# Altium PCB Sampler_DIOT.PCBDOC (part 1 of 10)
Units mm, origin at the board's own origin, x right, y up, seen from the top; angles counter-clockwise.
Board outline 222.9 x 100 mm, 4 copper layers (L1, P2, L3, L4), stack 1.6 mm thick; 697 components, 418 nets, 2175 pads, 1124 vias.
Unrouted connection lines stored in the file: 6.
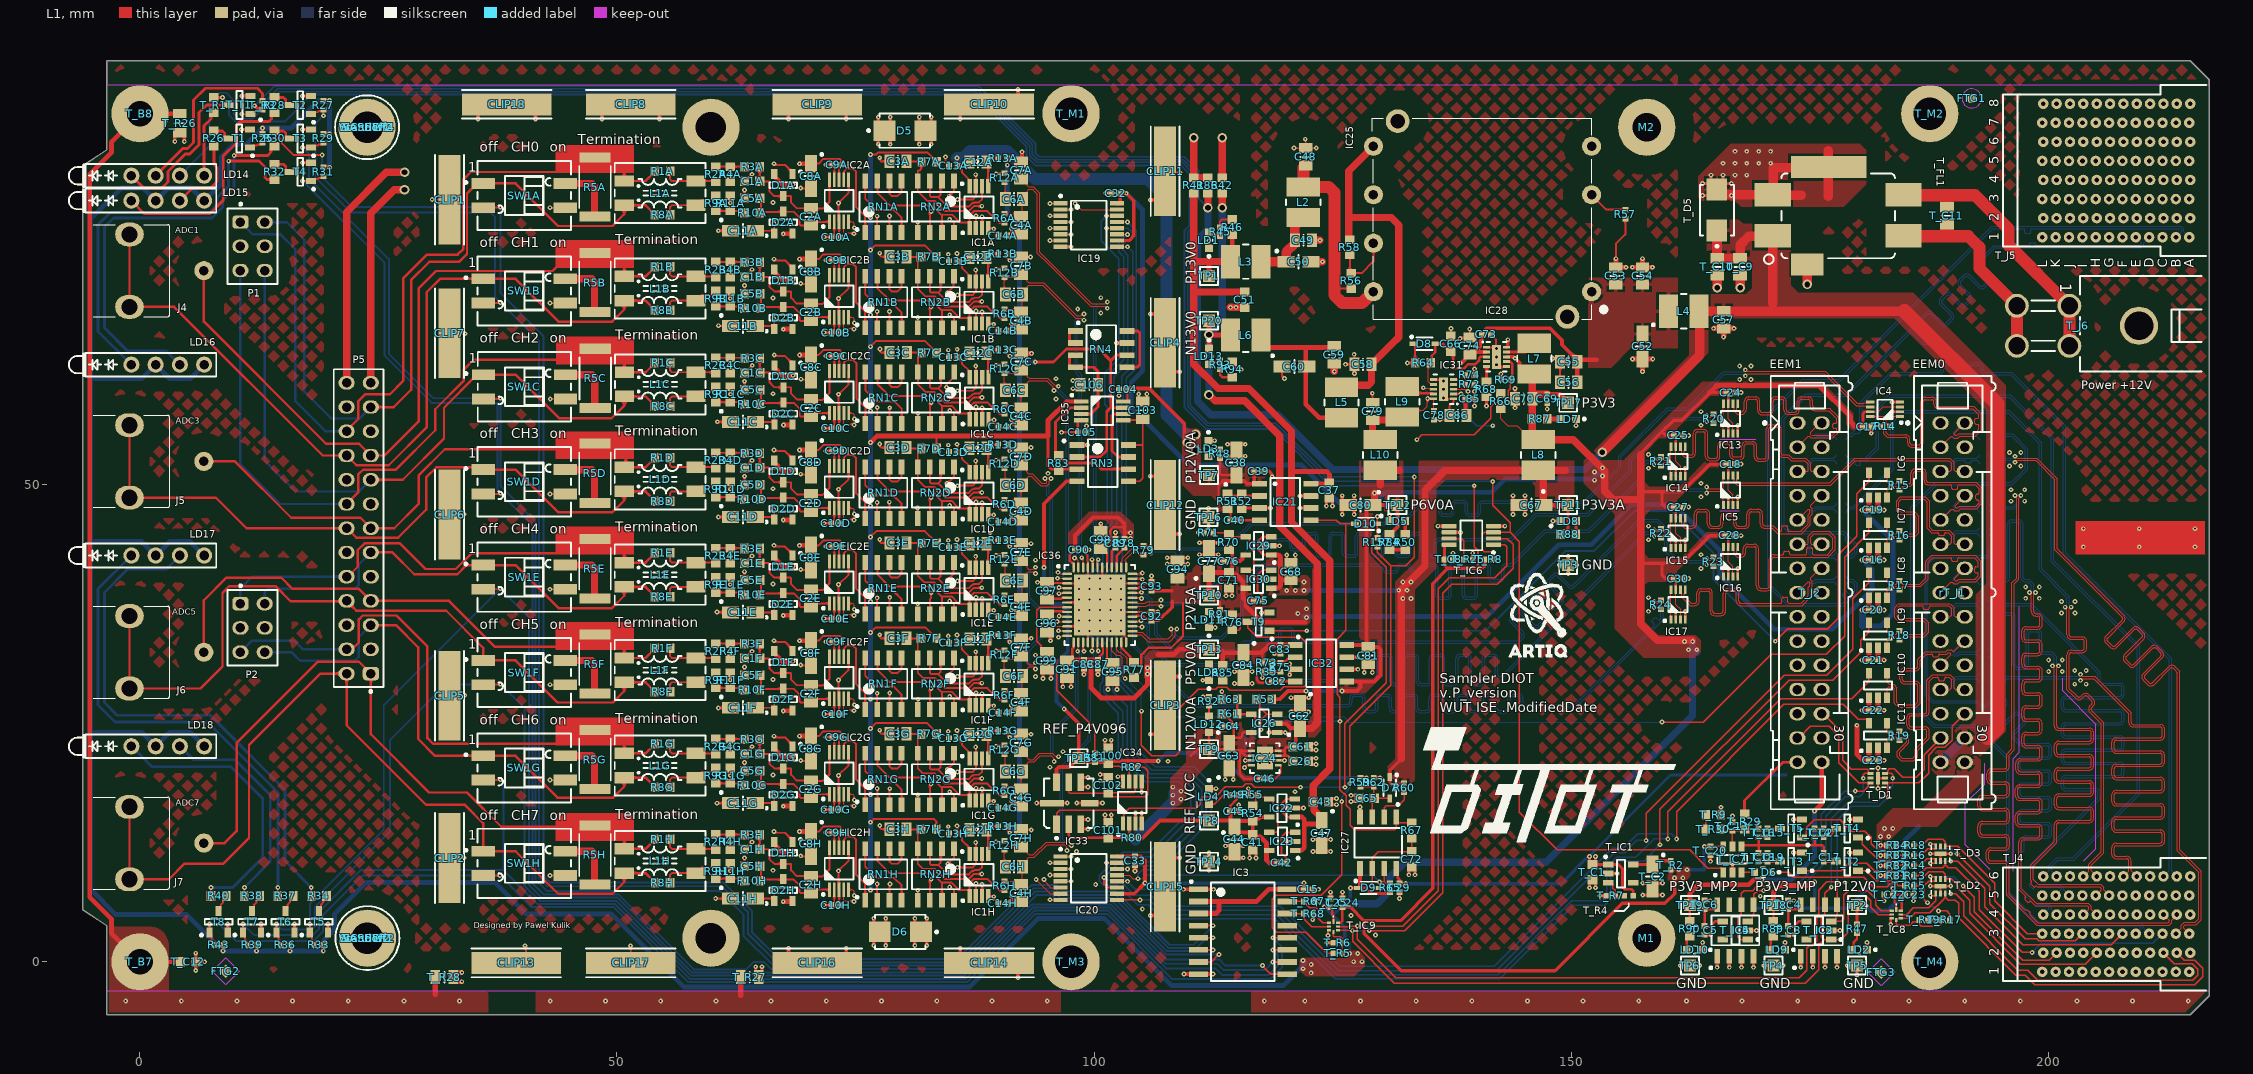
[diagram p0: L1 view]
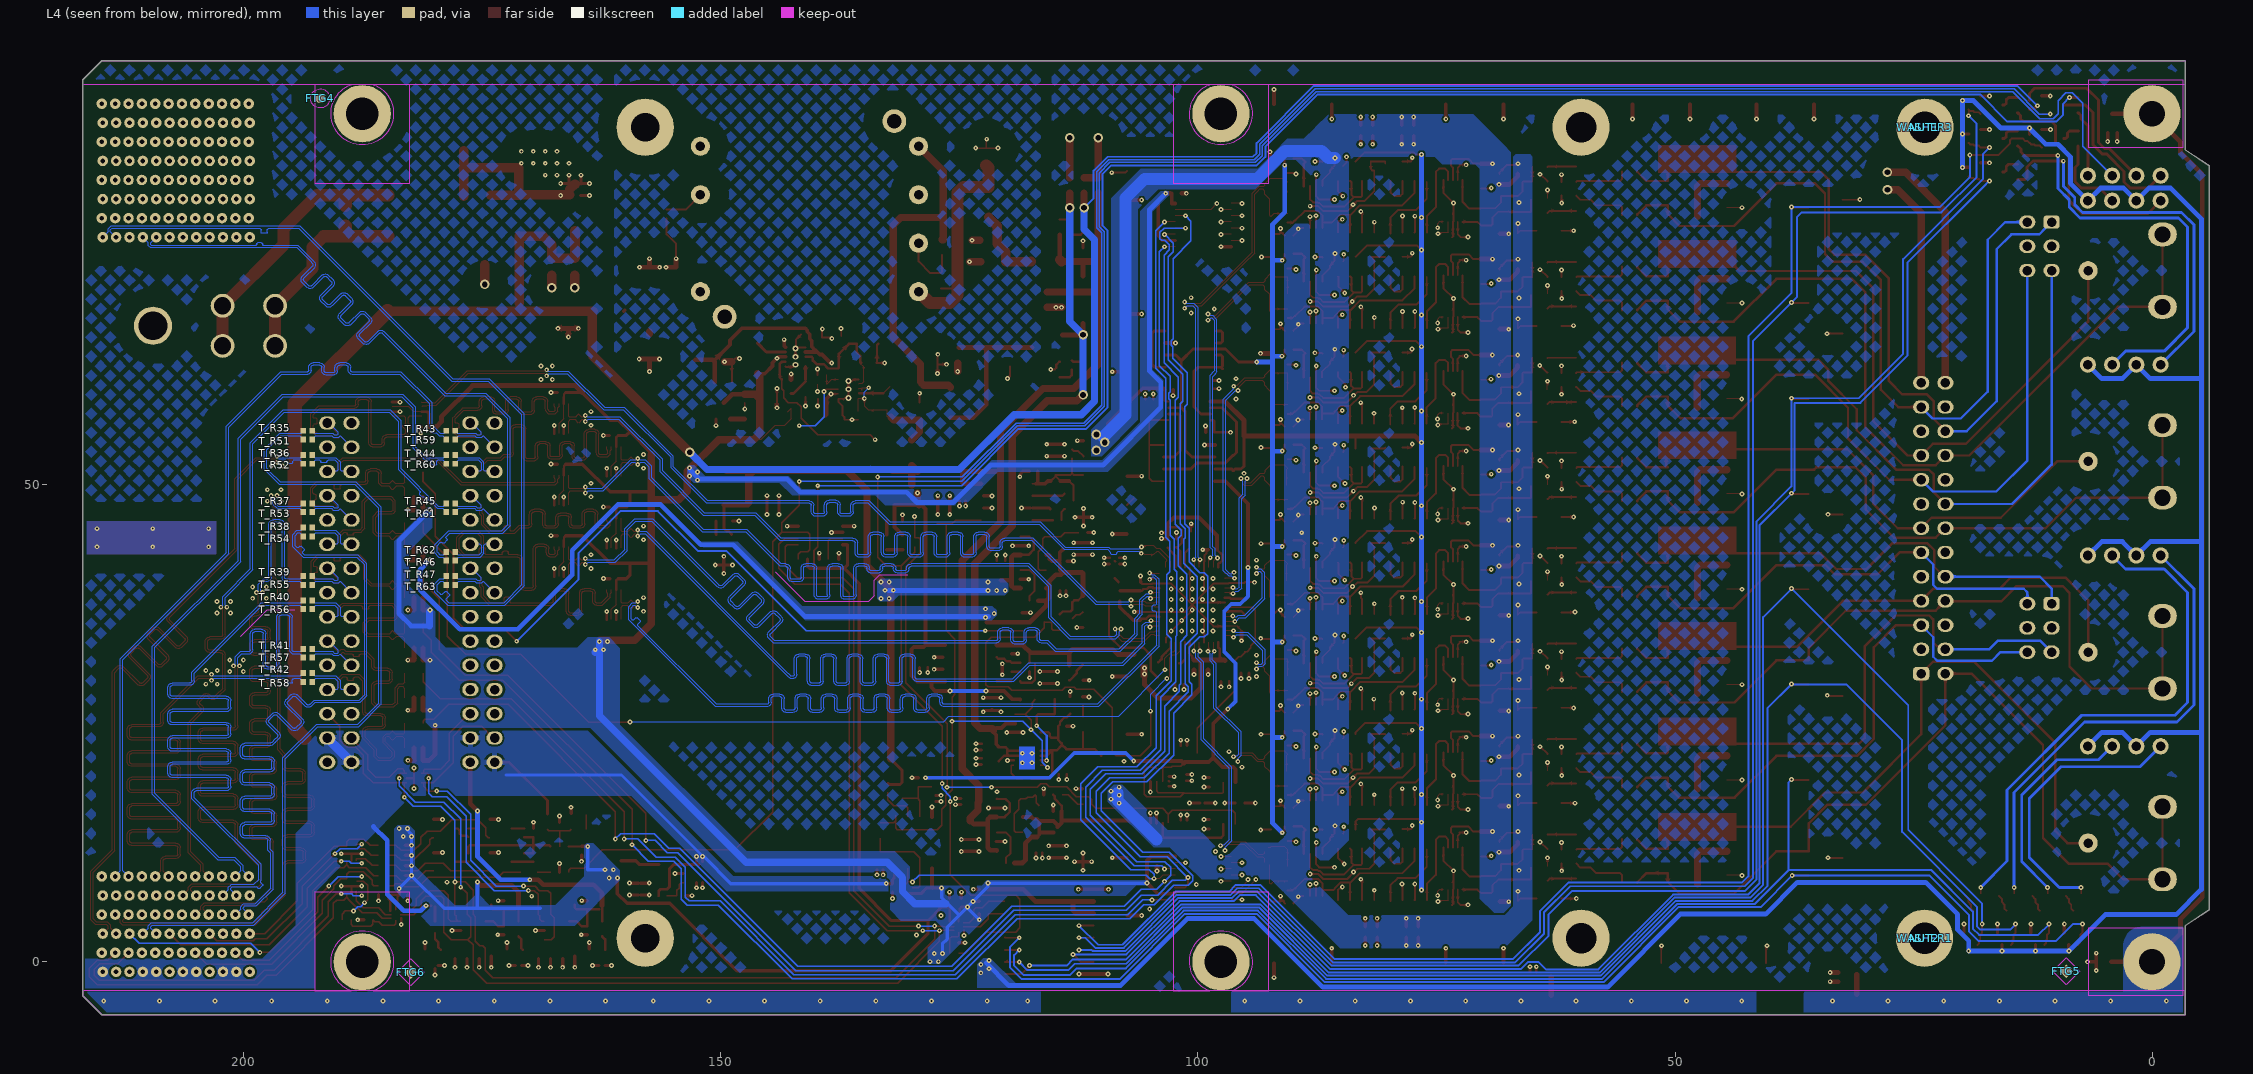
[diagram p1: L4 view, seen from below]
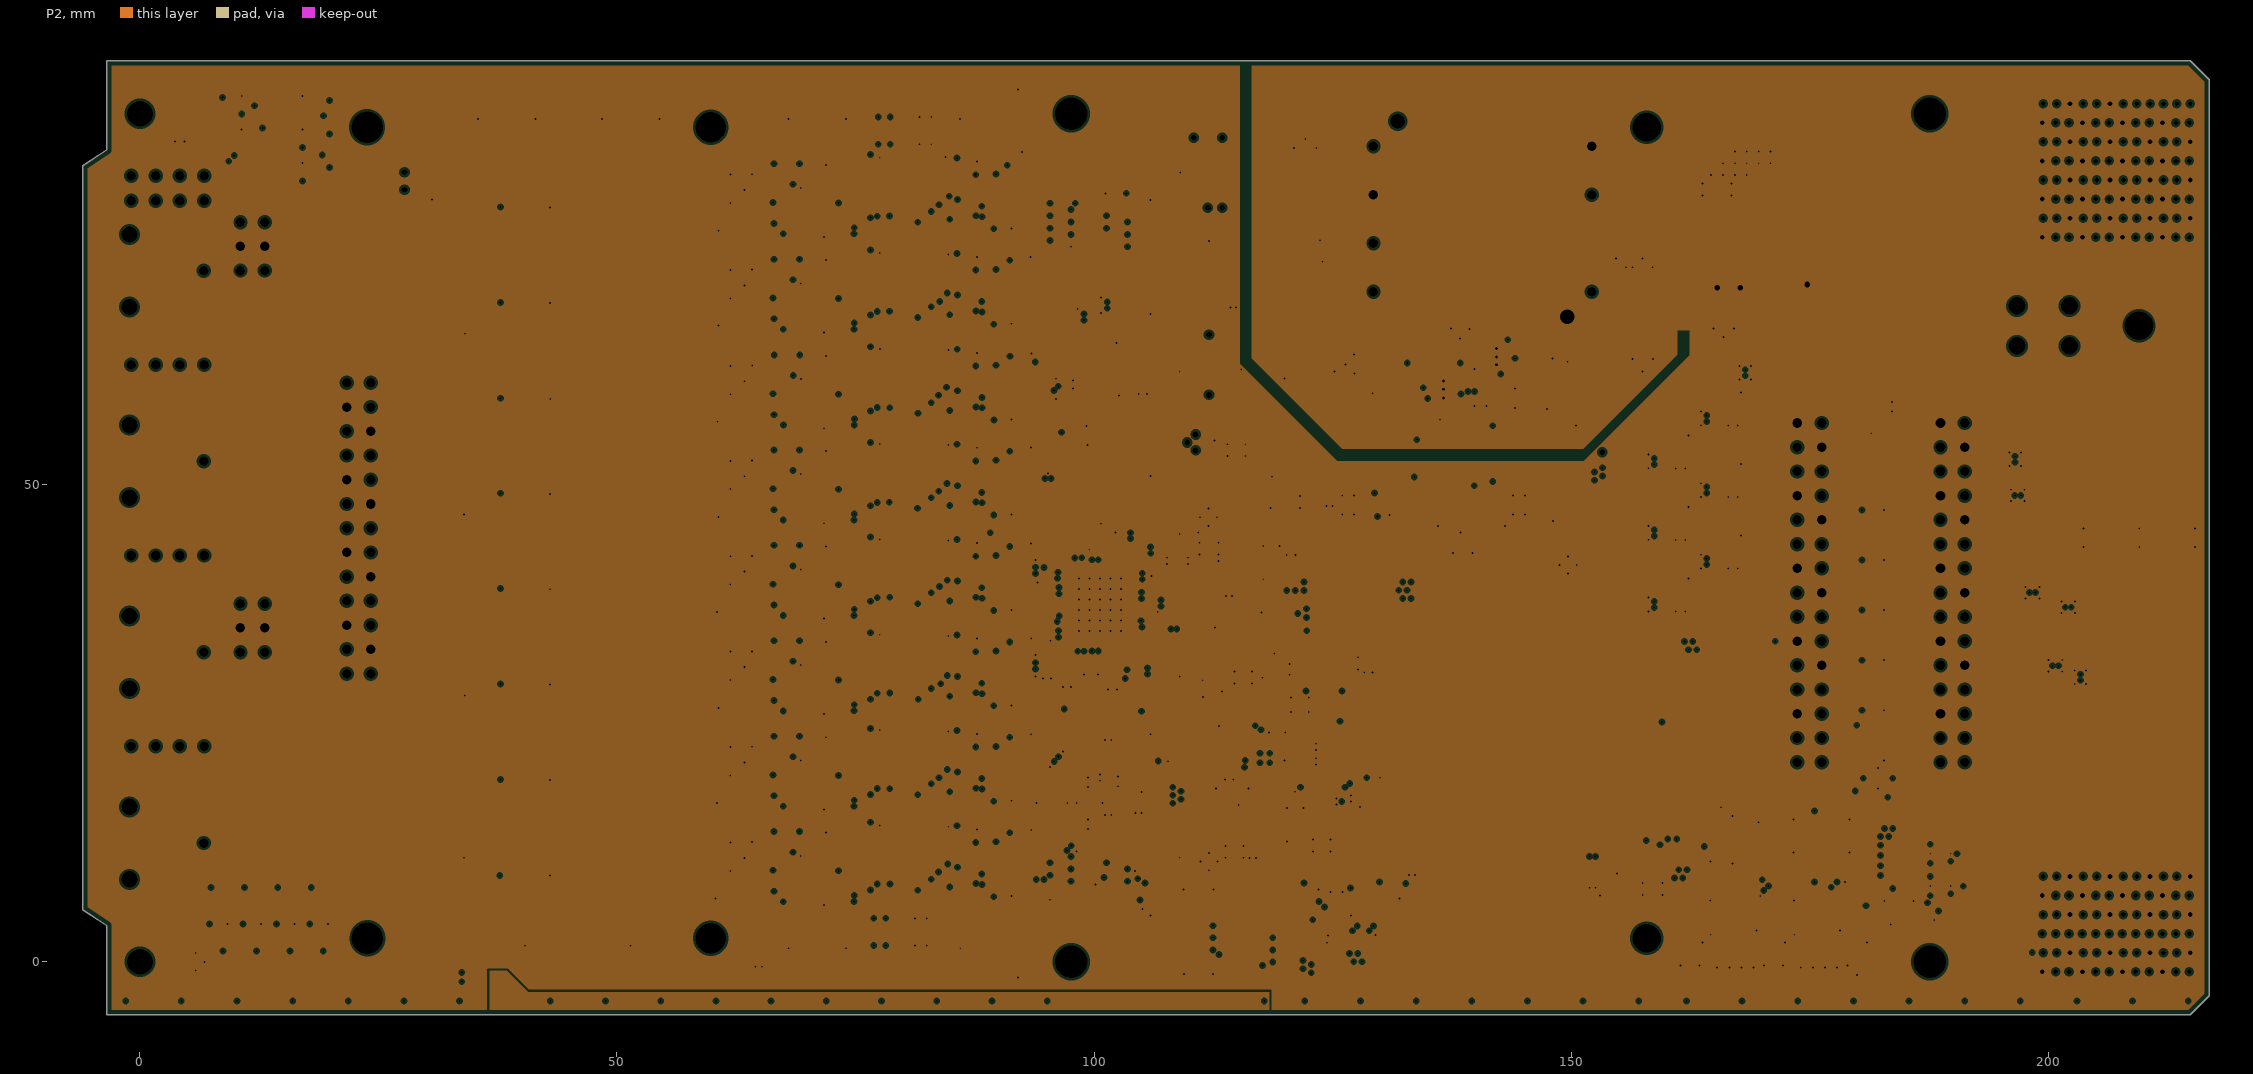
[diagram p2: P2, clearances drawn from the general rule]
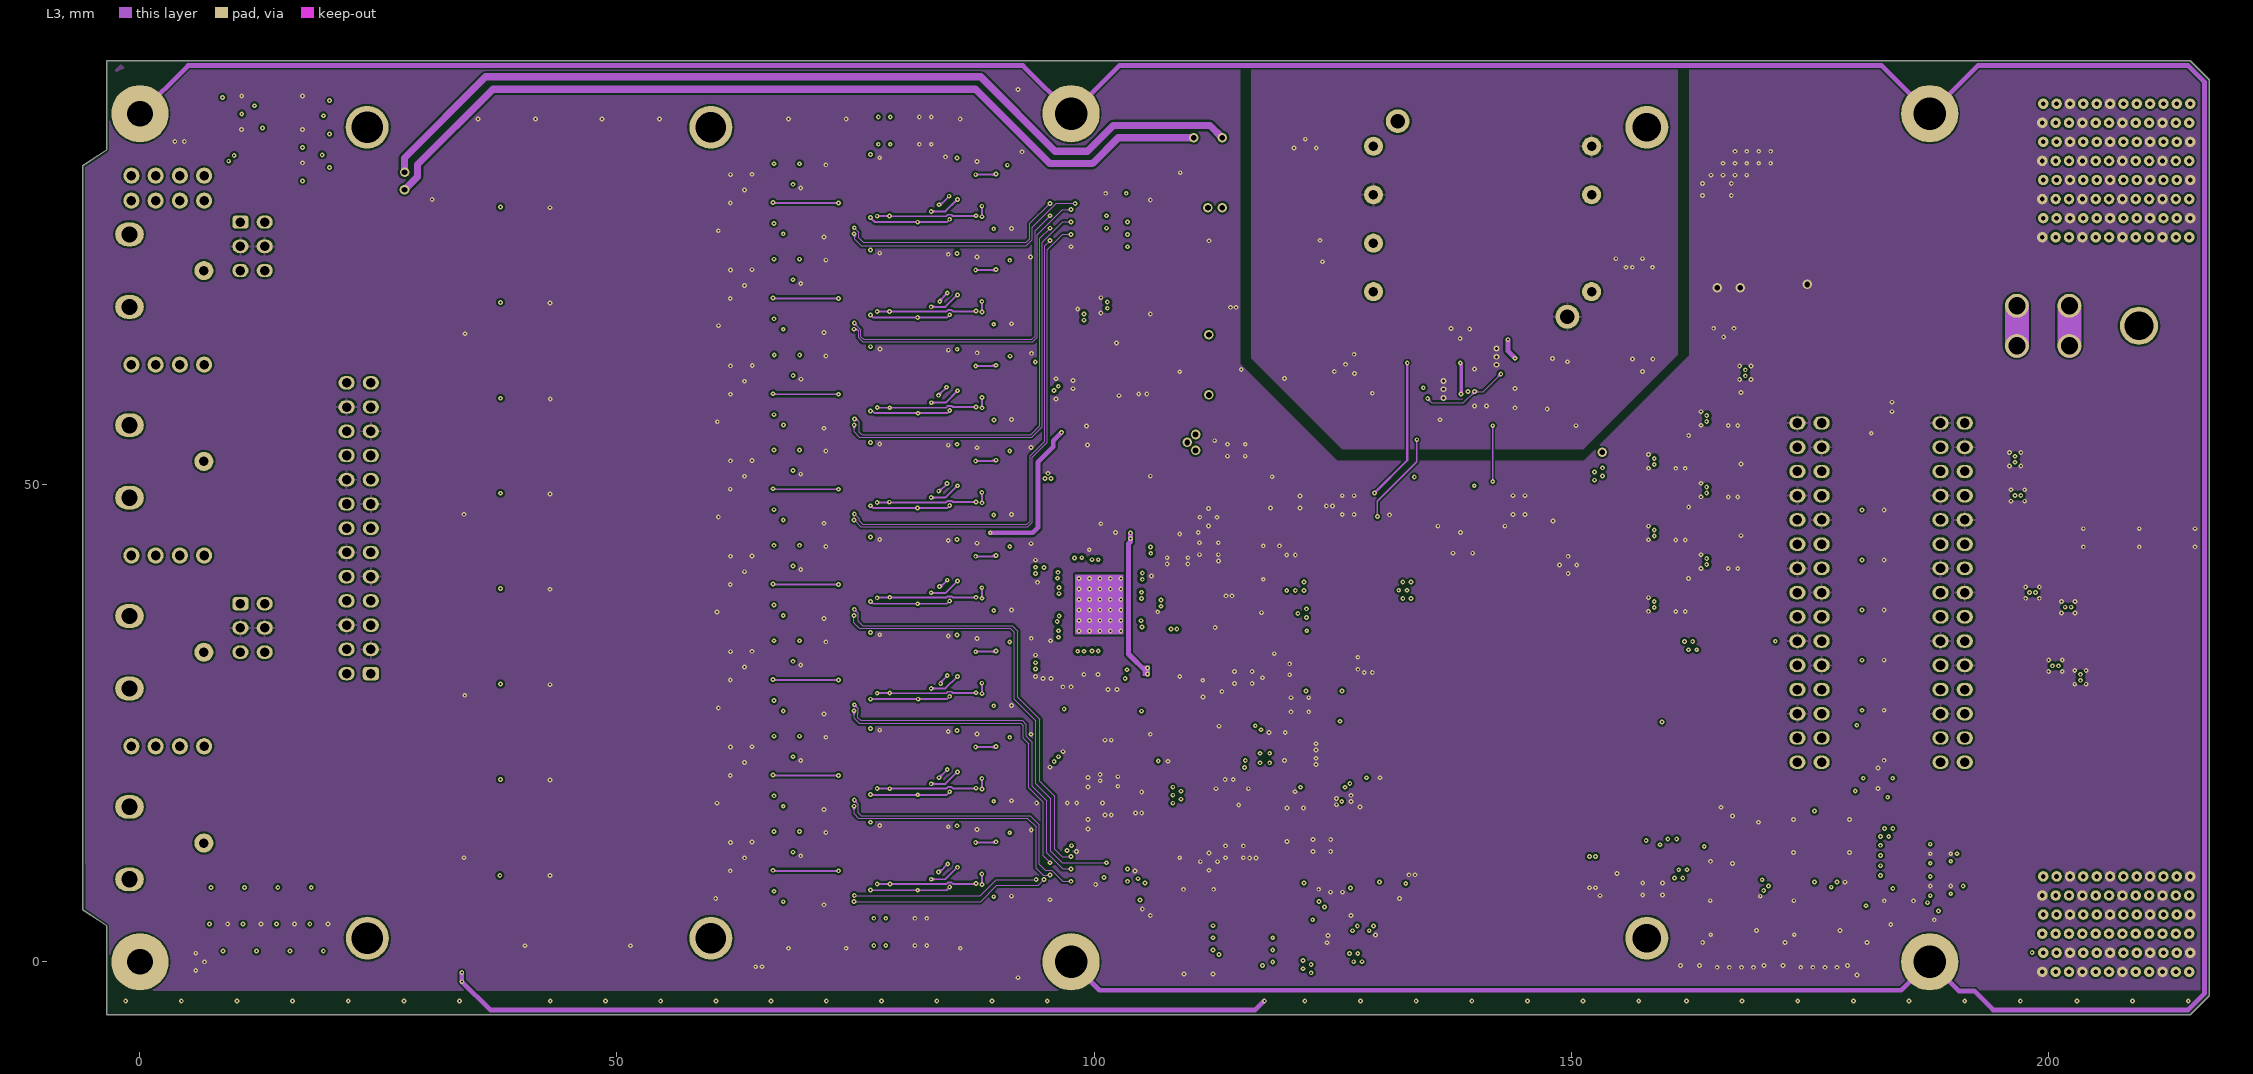
[diagram p3: L3]
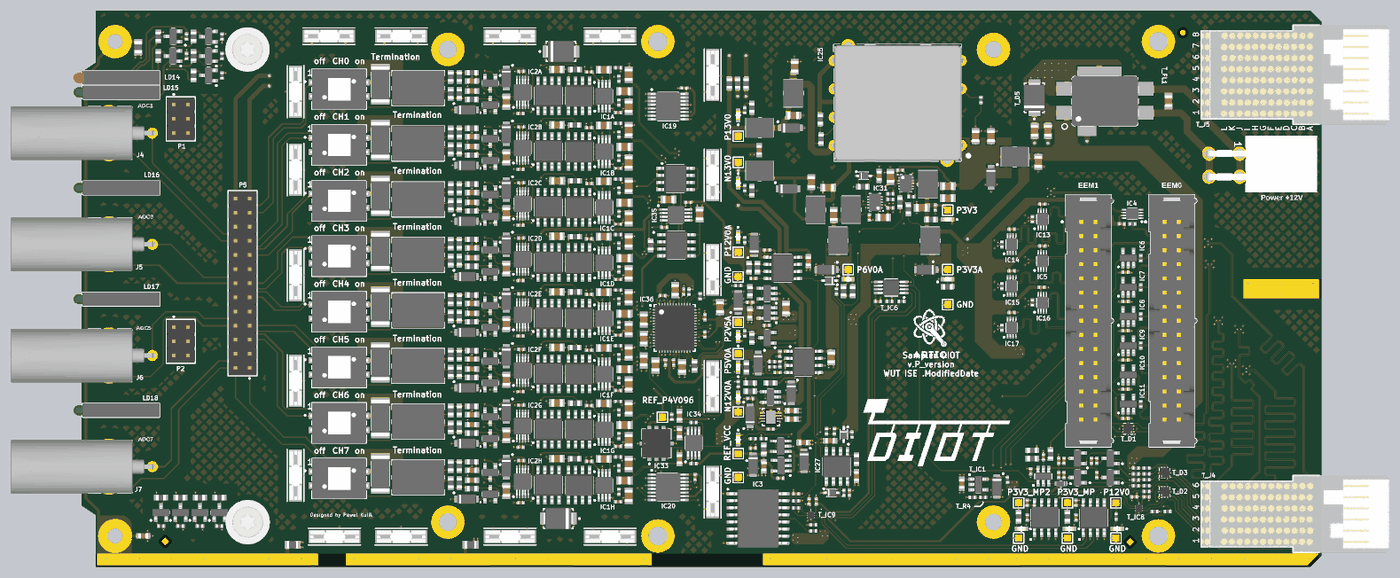
[diagram p11: 3D render of the assembled board from above, using the file's embedded part models]
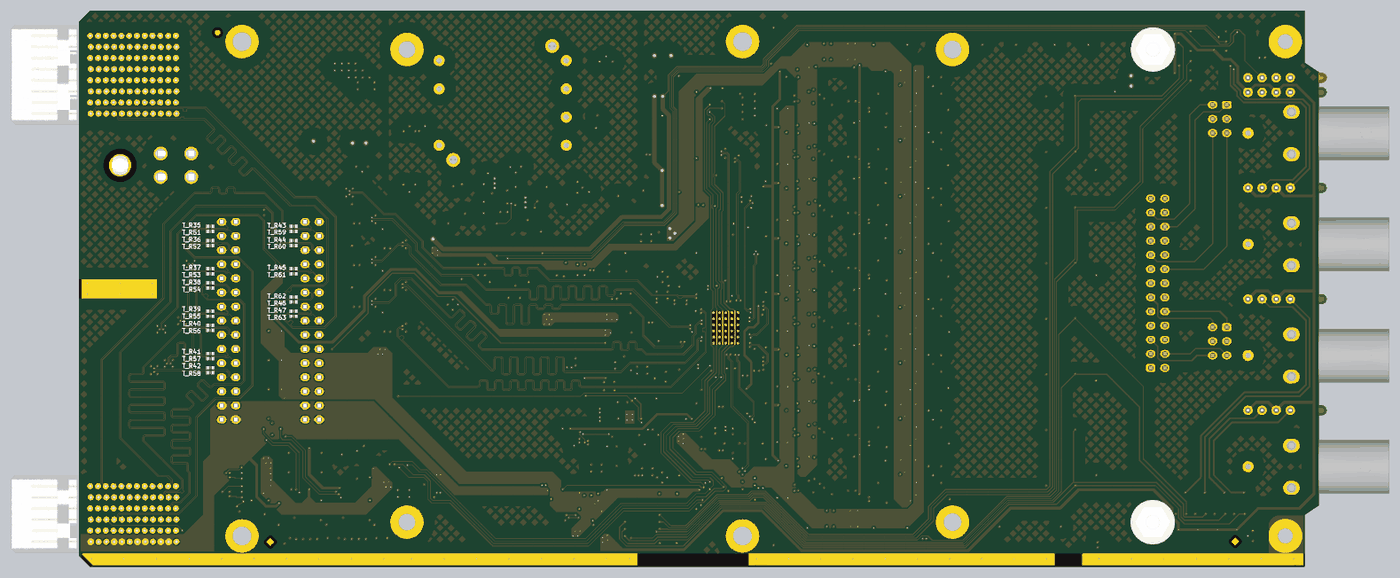
[diagram p12: 3D render of the assembled board from below, using the file's embedded part models]

## Layer stack, top to bottom
TopSolder: solder mask 0.0102, Solder Resist, Dk 3.5
L1: signal copper 0.045
Dielectric1: core 0.12, FR-4, Dk 4.2
P2: plane copper 0.035, net GND
Dielectric 3: prepreg 1.2, Dk 4.2
L3: signal copper 0.035
Dielectric2: core 0.12, FR-4, Dk 4.2
L4: signal copper 0.045
BottomSolder: solder mask 0.0102, Solder Resist, Dk 3.5

## Board outline
-3.5,3.8 -6,5.45 -6,83.45 -3.5,85.1 -3.5,94.45 214.9,94.45 216.9,92.45 216.9,-3.55 214.9,-5.55 -3.5,-5.55

## Design rules (kind name [scope] priority, off if disabled: settings)
AcuteAngle [All] p1: minimum=6.00000000000000E+0001 checktracksonly=FALSE
BoardOutlineClearance [not (OnSilkscreen and HasFootprint('LED_DIALIGHT_571-0122F')) and  not (OnSilkscreen and HasFootprint('LED_DIALIGHT_571-0112F'))] p1: gap=0.254 ignorepadtopadclearanceinfootprint=FALSE except(0: Arc-SplitContinuation Track-SplitContinuation SMDPad-SplitContinuation THPad-SplitContinuation Via-SplitContinuation Fill-SplitContinuation Poly-SplitContinuation Region-SplitContinuation Text-SplitContinuation)
Clearance Clearance_Balancing_To_Mechanicals [InPadClass('Mechanical') and (not PadIsPlated) vs InPolygonClass('PolyClass_Balancing')] p1: gap=0.7 ignorepadtopadclearanceinfootprint=FALSE // Clearance constraint used by the balancing polygon generator - between polygon and Mechanical pad class.
Clearance Clearance_Balancing_To_HV [InNetClass('HV') vs InPolygonClass('PolyClass_Balancing')] p2: gap=3 ignorepadtopadclearanceinfootprint=FALSE // Clearance constraint used by the balancing polygon generator - between polygon and HV Class.
Clearance Clearance_Balancing_To_DiffPair [InAnyDifferentialPair vs InPolygonClass('PolyClass_Balancing')] p3: gap=2.5 ignorepadtopadclearanceinfootprint=FALSE // Clearance constraint used by the balancing polygon generator - between polygon and Diff pairs.
Clearance Clearance_Balancing_To_Keepout [((not OnCopper) and isKeepout) vs InPolygonClass('PolyClass_Balancing')] p4: gap=0.127 ignorepadtopadclearanceinfootprint=FALSE // Clearance constraint used by the balancing polygon generator - between polygon and Keepout layer.
Clearance Clearance_Balancing_To_Poly [InPolygon vs InPolygonClass('PolyClass_Balancing')] p5: gap=2 ignorepadtopadclearanceinfootprint=FALSE // Clearance constraint used by the balancing polygon generator - between polygon and polygons.
Clearance Clearance_Balancing_To_Rest [not ((not OnCopper) and isKeepout) vs InPolygonClass('PolyClass_Balancing')] p6: gap=2 ignorepadtopadclearanceinfootprint=FALSE // Clearance constraint used by the balancing polygon generator - between polygon and everything else.
Clearance ESD_STRIP [All vs InNet('STRIP1') or InNet('STRIP2') or InNet('STRIP3')] p7 off: gap=0.127 ignorepadtopadclearanceinfootprint=FALSE except(0: Arc-Hole SMDPad-Hole THPad-Hole Via-Hole Fill-Hole Poly-Hole Region-Hole Text-Hole; 0.381: Arc-Poly SMDPad-Poly THPad-Poly Via-Poly Fill-Poly Poly-Poly; 1.5: Track-THPad Track-Via Track-Fill Track-Poly Track-Region Track-Text Track-Hole)
Clearance Clearance_Keepout_MH [IsKeepOut vs HasFootprint('c600h270')  or HasFootprint('PTH-M3.4X6.0_BTKO') or HasFootprint('FIDUCIAL_TOP_S100-200') or HasFootprint('FIDUCIAL_TOP_C100-200')] p8: gap=0 ignorepadtopadclearanceinfootprint=FALSE
Clearance Clearance_DIFF [(InDifferentialPairClass('All Differential Pairs'))] p9: gap=0.127 ignorepadtopadclearanceinfootprint=FALSE except(0: Arc-Hole Track-Hole SMDPad-Hole THPad-Hole Via-Hole Fill-Hole Poly-Hole Region-Hole Text-Hole; 0.254: Arc-Poly Track-Poly SMDPad-Poly THPad-Poly Via-Poly Fill-Poly Poly-Poly)
Clearance Clearance_Poly [InPoly] p10: gap=0.127 ignorepadtopadclearanceinfootprint=FALSE except(0: Arc-Hole Track-Hole SMDPad-Hole THPad-Hole Via-Hole Fill-Hole Poly-Hole Region-Hole Text-Hole; 0.2: Arc-Poly Track-Poly SMDPad-Poly THPad-Poly Via-Poly Fill-Poly Poly-Poly)
Clearance [All] p11: gap=0.127 ignorepadtopadclearanceinfootprint=TRUE except(0: Arc-Hole Track-Hole SMDPad-Hole THPad-Hole Via-Hole Fill-Hole Poly-Hole Region-Hole Text-Hole; 0.203: Track-Poly; 0.381: Arc-Poly SMDPad-Poly THPad-Poly Via-Poly Fill-Poly Poly-Poly)
ComponentClearance [All] p1 off: gap=0.254 collisioncheckmode=3 verticalgap=0.254 showdistances=FALSE
DiffPairsRouting [IsDifferentialPair] p1: maxlimit=0.127 minlimit=0.127 mostfreqgap=0.127 toplayer_minwidth=0.127 toplayer_maxwidth=0.127 toplayer_prefwidth=0.127 bottomlayer_minwidth=0.127 bottomlayer_maxwidth=0.127 bottomlayer_prefwidth=0.127 impedanceprofiledriven=TRUE impedanceprofileid={3B169204-1CC8-47AF-91E7-41E28CA6C3B4} impedanceprofilevalue=100.000000 maxuncoupledlength=21
FabricationTestPointUsage TestPointUsage [All] p1: valid=0 allowmultiple=FALSE
FabricationTestpoint Testpoint [All] p1: side=3 testpointundercomponent=TRUE minsize=1.016 maxsize=2.54 preferedsize=1.524 minholesize=0.508 maxholesize=1.016 preferedholesize=0.813 testpointgrid=0.025 allowsidetop=TRUE allowsidebottom=TRUE usegrid=TRUE gridtolerance=0
Height [All] p1 off: minheight=0 maxheight=25.4 prefheight=12.7
HoleSize [All] p1: absolutevalues=TRUE maxlimit=3.81 minlimit=0.025 maxpercent=80.000 minpercent=20.000
HoleToHoleClearance [All] p1: gap=0.025 allowstackedmicrovias=TRUE
MatchedLengths MatchedLengths_EEM_LVDS_Pair [InxSignalClass('xSignals_EEM')] p1: tolerance=10 checknetsindiffpair=TRUE checkdiffpairvsdiffpair=FALSE checkxsignals=FALSE checkothers=FALSE usedelayunits=TRUE delaytolerance=1.000000
MatchedLengths MatchedLengths_EEM_LVDS_Group [InxSignalClass('xSignals_EEM')] p2: tolerance=15 checknetsindiffpair=FALSE checkdiffpairvsdiffpair=TRUE checkxsignals=TRUE checkothers=TRUE
MatchedLengths MatchedLengths_BP_LVDS_Pair [InxSignalClass('xSignals_DIOT')] p3: tolerance=10 checknetsindiffpair=TRUE checkdiffpairvsdiffpair=FALSE checkxsignals=FALSE checkothers=FALSE usedelayunits=TRUE delaytolerance=1.000000
MatchedLengths MatchedLengths_BP_LVDS_Group [InxSignalClass('xSignals_DIOT')] p4: tolerance=15 checknetsindiffpair=FALSE checkdiffpairvsdiffpair=TRUE checkxsignals=TRUE checkothers=TRUE
MatchedLengths MatchedLengths_ADC_IN_Pair [InxSignalClass('xSignals_ADC_IN')] p5: tolerance=0 checknetsindiffpair=TRUE checkdiffpairvsdiffpair=FALSE checkxsignals=FALSE checkothers=FALSE usedelayunits=TRUE delaytolerance=25.000000
MatchedLengths MatchedLengths_ADC_IN_Group [InxSignalClass('xSignals_ADC_IN')] p6: tolerance=40 checknetsindiffpair=FALSE checkdiffpairvsdiffpair=TRUE checkxsignals=TRUE checkothers=TRUE
MatchedLengths MatchedLengths_ADC_Drv_Pair [InxSignalClass('xSignals_ADC_Drv')] p7: tolerance=10 checknetsindiffpair=TRUE checkdiffpairvsdiffpair=FALSE checkxsignals=FALSE checkothers=FALSE usedelayunits=TRUE delaytolerance=1.000000
MatchedLengths MatchedLengths_ADC_Drv_Group [InxSignalClass('xSignals_ADC_Drv')] p8: tolerance=10 checknetsindiffpair=FALSE checkdiffpairvsdiffpair=TRUE checkxsignals=TRUE checkothers=TRUE
MatchedLengths MatchedLengths_ADC_Drv_EEM_Pair [InxSignalClass('xSignals_ADC_Drv_EEM')] p9: tolerance=10 checknetsindiffpair=TRUE checkdiffpairvsdiffpair=FALSE checkxsignals=FALSE checkothers=FALSE usedelayunits=TRUE delaytolerance=1.000000
MatchedLengths MatchedLengths_ADC_Drv_EEM_Group [InxSignalClass('xSignals_ADC_Drv_EEM')] p10: tolerance=10 checknetsindiffpair=FALSE checkdiffpairvsdiffpair=TRUE checkxsignals=TRUE checkothers=TRUE
MatchedLengths MatchedLengths_ADC_Drv_DIOT_Pair [InxSignalClass('xSignals_ADC_Drv_DIOT')] p11: tolerance=10 checknetsindiffpair=TRUE checkdiffpairvsdiffpair=FALSE checkxsignals=FALSE checkothers=FALSE usedelayunits=TRUE delaytolerance=1.000000
MatchedLengths MatchedLengths_ADC_Drv_DIOT_Group [InxSignalClass('xSignals_ADC_Drv_DIOT')] p12: tolerance=10 checknetsindiffpair=FALSE checkdiffpairvsdiffpair=TRUE checkxsignals=TRUE checkothers=TRUE
MinimumSolderMaskSliver MinimumSolderMaskSliver_QFN_ADC [All vs HasFootprint('QFN50P700X800X80_HS-53M')] p1: minsoldermaskwidth=0.025
MinimumSolderMaskSliver MinimumSolderMaskSliver_FXMA2102UMX [All vs HasFootprint('FXMA2102UMX')] p2: minsoldermaskwidth=0.023
MinimumSolderMaskSliver [All] p3: minsoldermaskwidth=0.051
ParallelSegment [All vs InNetClass('ADC_IN')] p1: limit=10 gap=0.508
PlaneClearance [All] p1: clearance=0.254
PlaneConnect [All] p1: pad.planeconnectstyle=Relief pad.reliefexpansion=0.508 pad.reliefentries=4 pad.reliefconductorwidth=0.254 pad.reliefairgap=0.254 via.planeconnectstyle=Direct via.reliefexpansion=0.508 via.reliefentries=4 via.reliefconductorwidth=0.254 via.reliefairgap=0.254
PolygonConnect PolygonConnect_PressFit [All vs HasFootprint('AMPHENOL_10052825-101LF') or HasFootprint('AMPHENOL_10052838-101LF')] p1: connectstyle=Direct reliefconductorwidth=0.254 reliefentries=4 polygonreliefangle="90 Angle" airgapwidth=0.254
PolygonConnect PolygonConnect_PWR [All vs InNetClass('PWR')] p2: thpad.connectstyle=Relief thpad.reliefconductorwidth=0.6 thpad.reliefentries=4 thpad.polygonreliefangle="90 Angle" thpad.airgapwidth=0.254 smdpad.connectstyle=Relief smdpad.reliefconductorwidth=0.4 smdpad.reliefentries=4 smdpad.polygonreliefangle="90 Angle" smdpad.airgapwidth=0.254 via.connectstyle=Direct via.reliefconductorwidth=0.254 via.reliefentries=4 via.polygonreliefangle="90 Angle" via.airgapwidth=0.254
PolygonConnect [All] p3: thpad.connectstyle=Relief thpad.reliefconductorwidth=0.254 thpad.reliefentries=4 thpad.polygonreliefangle="90 Angle" thpad.airgapwidth=0.254 smdpad.connectstyle=Relief smdpad.reliefconductorwidth=0.254 smdpad.reliefentries=4 smdpad.polygonreliefangle="90 Angle" smdpad.airgapwidth=0.254 via.connectstyle=Direct via.reliefconductorwidth=0.254 via.reliefentries=4 via.polygonreliefangle="90 Angle" via.airgapwidth=0.254
ReturnPath ReturnPath_Diff [InNetClass('New Class')] p1: impedanceprofileid={3B169204-1CC8-47AF-91E7-41E28CA6C3B4} _gaplimit=0
ReturnPath ReturnPath_50Ohm [InNetClass('ADC_IN')] p2: impedanceprofileid={9E40DA6C-C392-4780-9BCD-F7AD7DFDD65E} _gaplimit=0 _useantipads=TRUE
RoomDefinition U_PWR_Supply [InComponentClass('U_PWR_Supply')] p1: confinementstyle=ConfineIn formatcopy=TRUE lockcomponents=FALSE outline -7.831,-1.695 182.419,-1.695 182.419,91.855 -7.831,91.855
RoomDefinition U_Power_main_DCDC [InComponentClass('U_Power_main_DCDC')] p2: confinementstyle=ConfineIn formatcopy=TRUE lockcomponents=FALSE outline 75.844,0.58 167.244,0.58 167.244,90.28 75.844,90.28
RoomDefinition U_Input_channel8 [InComponentClass('U_Input_channel8')] p3: confinementstyle=ConfineIn formatcopy=TRUE lockcomponents=FALSE outline 33.644,5.105 93.644,5.105 93.644,15.405 33.644,15.405
RoomDefinition U_Input_channel7 [InComponentClass('U_Input_channel7')] p4: confinementstyle=ConfineIn formatcopy=TRUE lockcomponents=FALSE outline 33.644,15.105 93.644,15.105 93.644,25.405 33.644,25.405
RoomDefinition U_Input_channel6 [InComponentClass('U_Input_channel6')] p5: confinementstyle=ConfineIn formatcopy=TRUE lockcomponents=FALSE outline 33.644,25.105 93.644,25.105 93.644,35.405 33.644,35.405
RoomDefinition U_Input_channel5 [InComponentClass('U_Input_channel5')] p6: confinementstyle=ConfineIn formatcopy=TRUE lockcomponents=FALSE outline 33.644,35.105 93.644,35.105 93.644,45.405 33.644,45.405
RoomDefinition U_Input_channel4 [InComponentClass('U_Input_channel4')] p7: confinementstyle=ConfineIn formatcopy=TRUE lockcomponents=FALSE outline 33.644,45.105 93.644,45.105 93.644,55.405 33.644,55.405
RoomDefinition U_Input_channel3 [InComponentClass('U_Input_channel3')] p8: confinementstyle=ConfineIn formatcopy=TRUE lockcomponents=FALSE outline 33.669,55.08 93.669,55.08 93.669,65.355 33.669,65.355
RoomDefinition U_Input_channel2 [InComponentClass('U_Input_channel2')] p9: confinementstyle=ConfineIn formatcopy=TRUE lockcomponents=FALSE outline 33.644,65.105 93.644,65.105 93.644,75.405 33.644,75.405
RoomDefinition U_Input_channel1 [InComponentClass('U_Input_channel1')] p10: confinementstyle=ConfineIn formatcopy=TRUE lockcomponents=FALSE outline 33.644,75.105 93.644,75.105 93.644,85.405 33.644,85.405
RoomDefinition U_Drivers [InComponentClass('U_Drivers')] p11: confinementstyle=ConfineIn formatcopy=TRUE lockcomponents=FALSE outline 95.219,-2.645 185.469,-2.645 185.469,81.355 95.219,81.355
RoomDefinition U_ADC_8CH [InComponentClass('U_ADC_8CH')] p12: confinementstyle=ConfineIn formatcopy=TRUE lockcomponents=FALSE outline 93.769,20.205 119.494,20.205 119.494,67.505 93.769,67.505
RoomDefinition "Power input connector" [InComponentClass('Power input connector')] p13: confinementstyle=ConfineIn formatcopy=TRUE lockcomponents=FALSE outline 162.769,61.505 216.469,61.505 216.469,84.93 162.769,84.93
RoomDefinition Overlapping [InComponentClass('Overlapping')] p14: confinementstyle=ConfineIn formatcopy=TRUE lockcomponents=FALSE outline 193.446,-4.654 193.446,13.547 229.679,13.547 229.679,-4.654
RoutingVias [All] p1: holewidth=0.2 width=0.5 viastyle="Through Hole" minholewidth=0.2 minwidth=0.5 maxholewidth=0.711 maxwidth=1.27
SilkToSilkClearance [All] p1: silktosilkclearance=0.203
SilkToSolderMaskClearance SilkscreenOverComponentPads [IsPad] p1: minsilkscreentomaskgap=0.127 clearancetoexposedcopper=TRUE
SolderMaskExpansion SolderMaskExpansion_Via [isVia] p1: expansion=0.102 istentingtop=TRUE
SolderMaskExpansion [All] p2: expansion=0.051 istentingtop=FALSE
SupplyNets "Schematic Supply Nets_20" [InNet('REF_P1V7066')] p1: voltage=0.000
SupplyNets "Schematic Supply Nets_19" [InNet('P13V0S')] p2: voltage=0.000
SupplyNets "Schematic Supply Nets_18" [InNet('P6V0A')] p3: voltage=0.000
SupplyNets "Schematic Supply Nets_17" [InNet('P3V3_MP')] p4: voltage=0.000
SupplyNets "Schematic Supply Nets_16" [InNet('P12V0A')] p5: voltage=0.000
SupplyNets "Schematic Supply Nets_15" [InNet('P6V0')] p6: voltage=0.000
SupplyNets "Schematic Supply Nets_14" [InNet('REF_VCC')] p7: voltage=0.000
SupplyNets "Schematic Supply Nets_13" [InNet('P3V3')] p8: voltage=0.000
SupplyNets "Schematic Supply Nets_12" [InNet('P3V3_MP2')] p9: voltage=0.000
SupplyNets "Schematic Supply Nets_11" [InNet('N13V0S')] p10: voltage=0.000
SupplyNets "Schematic Supply Nets_10" [InNet('N13V0')] p11: voltage=0.000
SupplyNets "Schematic Supply Nets_9" [InNet('P5V0A')] p12: voltage=0.000
SupplyNets "Schematic Supply Nets_8" [InNet('P13V0')] p13: voltage=0.000
SupplyNets "Schematic Supply Nets_7" [InNet('P12V0')] p14: voltage=0.000
SupplyNets "Schematic Supply Nets_6" [InNet('STRIP1')] p15: voltage=0.000
SupplyNets "Schematic Supply Nets_5" [InNet('REF_P4V096')] p16: voltage=0.000
SupplyNets "Schematic Supply Nets_4" [InNet('P3V3A')] p17: voltage=0.000
SupplyNets "Schematic Supply Nets_3" [InNet('P2V5A')] p18: voltage=0.000
SupplyNets "Schematic Supply Nets_2" [InNet('REF_P2V048')] p19: voltage=0.000
SupplyNets "Schematic Supply Nets_1" [InNet('GND')] p20: voltage=0.000
SupplyNets "Schematic Supply Nets" [InNet('N12V0A')] p21: voltage=0.000
UnRoutedNet [not InPolygonClass('PolyClass_Balancing')] p1: checkbadconnections=TRUE
Width ADC_50Ohm [InNetClass('ADC_IN') or InNetClass('50R')] p1: maxlimit=0.199 minlimit=0.145 preferedwidth=0.199 toplayer_minwidth=0.199 midlayer1_maxwidth=0.145 midlayer1_prefwidth=0.145 bottomlayer_minwidth=0.199 impedanceprofiledriven=TRUE impedanceprofileid={9E40DA6C-C392-4780-9BCD-F7AD7DFDD65E} impedanceprofilevalue=50.000000 minimp=50.000000 maximp=50.000000 favimp=50.000000
Width [All] p2: maxlimit=2.5 minlimit=0.127 preferedwidth=0.254 minimp=50.000000 maximp=50.000000 favimp=50.000000
17 further rules are at their usual default settings.

## Classes and differential pairs
polygon class PolyClass_Balancing: Balancing_L1 Balancing_L3 Balancing_L4
differential pair class MGT: BP_MGT_Rx BP_MGT_Tx
differential pair class Diff_100Ohm: BP_CLK.CLK EEM_IO.LVDS0 EEM_IO.LVDS1 EEM_IO.LVDS2 EEM_IO.LVDS3 EEM_IO.LVDS4 EEM_IO.LVDS5 EEM_IO.LVDS6 EEM_IO.LVDS7 EEM_IO.LVDS8 EEM_IO.LVDS9 EEM_IO.LVDS10 EEM_IO.LVDS11 EEM_IO.LVDS12 EEM_IO.LVDS13 EEM_IO.LVDS14 EEM_IO.LVDS15
net class TERM_IND[7..0]: TERM_IND0 TERM_IND1 TERM_IND2 TERM_IND3 TERM_IND4 TERM_IND5 TERM_IND6 TERM_IND7
net class IN_P[7..0]: IN_P0 IN_P1 IN_P2 IN_P3 IN_P4 IN_P5 IN_P6 IN_P7
net class IN_N[7..0]: IN_N0 IN_N1 IN_N2 IN_N3 IN_N4 IN_N5 IN_N6 IN_N7
net class ESD_STRIP: STRIP1 STRIP2 STRIP3
net class A1[7..0]: A10 A11 A12 A13 A14 A15 A16 A17
net class A0[7..0]: A00 A01 A02 A03 A04 A05 A06 A07
component class U_Temp_monitoring: T_C8 T_IC6 T_R25
component class U_PWR_Supply: LD1 LD2 LD3 LD4 LD5 LD6 LD7 LD8 LD9 LD10 LD11 LD12 LD13 LD14 R45 R46 R47 R48 R49 R50 R84 R85 R87 R88 R89 R90 R91 R92 R93 R94 T_C1 T_C2 T_IC1 T_R1 T_R2 T_R3 T_R4 T_R7 T_R8 T_T1 TP1 TP2 TP3 TP4 TP5 TP6 TP7 TP8 TP9 TP10 TP11 TP12 TP13 TP14 TP15 TP16 TP17 TP18 TP19 TP20
component class U_Power-up_delay: T_C13 T_C14 T_C15 T_C16 T_C17 T_C18 T_C19 T_C20 T_C21 T_D6 T_IC7 T_R9 T_R29 T_R30 T_R31 T_R32 T_R33 T_R34 T_T2 T_T3 T_T4 T_T5
component class U_Mechanical: CLIP1 CLIP2 CLIP3 CLIP4 CLIP5 CLIP6 CLIP7 CLIP8 CLIP9 CLIP10 CLIP11 CLIP12 CLIP13 CLIP14 CLIP15 CLIP16 CLIP17 CLIP18 FTG1 FTG2 FTG3 FTG4 FTG5 FTG6 M1 M2 NUT1 NUT2 SCREW1 SCREW2 Standoff1 Standoff2 T_B7 T_B8 T_C12 T_M1 T_M2 T_M3 T_M4 T_R26 T_R27 T_R28 WASHER1 WASHER2 WASHER3 WASHER4
component class U_DIOT_signal_routing: T_C22 T_C23 T_IC8 T_R35 T_R36 T_R37 T_R38 T_R39 T_R40 T_R41 T_R42 T_R43 T_R44 T_R45 T_R46 T_R47 T_R51 T_R52 T_R53 T_R54 T_R55 T_R56 T_R57 T_R58 T_R59 T_R60 T_R61 T_R62 T_R63
component class Overlapping: T_J4
component class "I2C switch": T_C24 T_C25 T_IC9 T_R5 T_R6 T_R67 T_R68
component class EEM_Connectors: rT_J1 T_C3 T_C4 T_C5 T_C6 T_D1 T_IC2 T_IC3 T_IC4 T_IC5 T_J2
net class ADC_IN_P[7..0]: ADC_IN_P0 ADC_IN_P1 ADC_IN_P2 ADC_IN_P3 ADC_IN_P4 ADC_IN_P5 ADC_IN_P6 ADC_IN_P7
net class ADC_IN_N[7..0]: ADC_IN_N0 ADC_IN_N1 ADC_IN_N2 ADC_IN_N3 ADC_IN_N4 ADC_IN_N5 ADC_IN_N6 ADC_IN_N7
net class PWR: N12V0A N13V0 N13V0S NetC49_2 NetC52_1 NetC59_2 NetT_C2_1 NetT_C11_2 P2V5A P3V3 P3V3_MP P3V3A P5V0A P6V0 P6V0A P12V0 P12V0A P13V0 P13V0S REF_P4V096 REF_VCC
net class GA[0..3]: GA0 GA1 GA2 GA3
net class EEM_IO.LVDS_P[0..15]: EEM_IO.LVDS_P0 EEM_IO.LVDS_P1 EEM_IO.LVDS_P2 EEM_IO.LVDS_P3 EEM_IO.LVDS_P4 EEM_IO.LVDS_P5 EEM_IO.LVDS_P6 EEM_IO.LVDS_P7 EEM_IO.LVDS_P8 EEM_IO.LVDS_P9 EEM_IO.LVDS_P10 EEM_IO.LVDS_P11 EEM_IO.LVDS_P12 EEM_IO.LVDS_P13 EEM_IO.LVDS_P14 EEM_IO.LVDS_P15
net class EEM_IO.LVDS_N[0..15]: EEM_IO.LVDS_N0 EEM_IO.LVDS_N1 EEM_IO.LVDS_N2 EEM_IO.LVDS_N3 EEM_IO.LVDS_N4 EEM_IO.LVDS_N5 EEM_IO.LVDS_N6 EEM_IO.LVDS_N7 EEM_IO.LVDS_N8 EEM_IO.LVDS_N9 EEM_IO.LVDS_N10 EEM_IO.LVDS_N11 EEM_IO.LVDS_N12 EEM_IO.LVDS_N13 EEM_IO.LVDS_N14 EEM_IO.LVDS_N15
net class BP_IO.LVDS_P[0..15]: BP_IO.LVDS_P0 BP_IO.LVDS_P1 BP_IO.LVDS_P2 BP_IO.LVDS_P3 BP_IO.LVDS_P4 BP_IO.LVDS_P5 BP_IO.LVDS_P6 BP_IO.LVDS_P7 BP_IO.LVDS_P8 BP_IO.LVDS_P9 BP_IO.LVDS_P10 BP_IO.LVDS_P11 BP_IO.LVDS_P12 BP_IO.LVDS_P13 BP_IO.LVDS_P14 BP_IO.LVDS_P15
net class BP_IO.LVDS_N[0..15]: BP_IO.LVDS_N0 BP_IO.LVDS_N1 BP_IO.LVDS_N2 BP_IO.LVDS_N3 BP_IO.LVDS_N4 BP_IO.LVDS_N5 BP_IO.LVDS_N6 BP_IO.LVDS_N7 BP_IO.LVDS_N8 BP_IO.LVDS_N9 BP_IO.LVDS_N10 BP_IO.LVDS_N11 BP_IO.LVDS_N12 BP_IO.LVDS_N13 BP_IO.LVDS_N14 BP_IO.LVDS_N15
component class "Power input connector": T_C9 T_C10 T_C11 T_D5 T_FL1 T_J6
component class U_Drivers: C15 C16 C17 C18 C19 C20 C21 C22 C23 C24 C25 C27 C28 C30 C32 C33 IC3 IC4 IC5 IC6 IC7 IC8 IC9 IC10 IC11 IC13 IC14 IC15 IC16 IC17 IC19 IC20 IC3000 IC3003 R14 R15 R16 R17 R18 R19 R20 R21 R22 R23 R24
component class CPCIS_Connectors_P1_P6: T_D2 T_D3 T_J4 T_J5 T_R13 T_R14 T_R15 T_R16 T_R17 T_R18 T_R19
channel class Input_channel: U_Input_channel1 U_Input_channel2 U_Input_channel3 U_Input_channel4 U_Input_channel5 U_Input_channel6 U_Input_channel7 U_Input_channel8
component class U_Power_main_DCDC: C26 C29 C37 C38 C39 C40 C41 C42 C43 C44 C45 C46 C47 C48 C49 C50 C51 C52 C53 C54 C55 C56 C57 C58 C59 C60 C61 C62 C63 C64 C65 C66 C67 C68 C69 C70 C71 C72 C73 C74 C75 C76 C77 C78 C79 C80 C81 C82 C83 C84 C85 C86 C100 C101 C102 D5 D6 D7 D8 D9 D10 IC21 IC22 IC23 IC24 IC25 IC26 IC27 IC28 IC29 IC30 IC31 IC32 IC33 IC34 L2 L3 L4 L5 L6 L7 L8 L9 L10 R35 R51 R52 R53 R54 R55 R56 R57 R58 R59 R60 R61 R62 R63 R64 R65 R66 R67 R68 R69 R70 R71 R72 R73 R74 R75 R80 R82 R157
component class U_Input_channel8: C1H C2H C3H C4H C5H C6H C7H C8H C9H C10H C11H C12H C13H C14H D1H D2H IC1H IC2H L1H R1H R2H R3H R4H R5H R6H R7H R8H R9H R10H R11H R12H R13H RN1H RN2H SW1H
component class U_Input_channel7: C1G C2G C3G C4G C5G C6G C7G C8G C9G C10G C11G C12G C13G C14G D1G D2G IC1G IC2G L1G R1G R2G R3G R4G R5G R6G R7G R8G R9G R10G R11G R12G R13G RN1G RN2G SW1G
component class U_Input_channel6: C1F C2F C3F C4F C5F C6F C7F C8F C9F C10F C11F C12F C13F C14F D1F D2F IC1F IC2F L1F R1F R2F R3F R4F R5F R6F R7F R8F R9F R10F R11F R12F R13F RN1F RN2F SW1F
component class U_Input_channel5: C1E C2E C3E C4E C5E C6E C7E C8E C9E C10E C11E C12E C13E C14E D1E D2E IC1E IC2E L1E R1E R2E R3E R4E R5E R6E R7E R8E R9E R10E R11E R12E R13E RN1E RN2E SW1E
component class U_Input_channel4: C1D C2D C3D C4D C5D C6D C7D C8D C9D C10D C11D C12D C13D C14D D1D D2D IC1D IC2D L1D R1D R2D R3D R4D R5D R6D R7D R8D R9D R10D R11D R12D R13D RN1D RN2D SW1D
component class U_Input_channel3: C1C C2C C3C C4C C5C C6C C7C C8C C9C C10C C11C C12C C13C C14C D1C D2C IC1C IC2C L1C R1C R2C R3C R4C R5C R6C R7C R8C R9C R10C R11C R12C R13C RN1C RN2C SW1C
component class U_Input_channel2: C1B C2B C3B C4B C5B C6B C7B C8B C9B C10B C11B C12B C13B C14B D1B D2B IC1B IC2B L1B R1B R2B R3B R4B R5B R6B R7B R8B R9B R10B R11B R12B R13B RN1B RN2B SW1B
component class U_Input_channel1: C1A C2A C3A C4A C5A C6A C7A C8A C9A C10A C11A C12A C13A C14A D1A D2A IC1A IC2A L1A R1A R2A R3A R4A R5A R6A R7A R8A R9A R10A R11A R12A R13A RN1A RN2A SW1A
component class U_ADC_8CH: C87 C88 C89 C90 C91 C92 C93 C94 C95 C96 C97 C98 C99 C103 C104 C105 C106 IC35 IC36 R76 R77 R78 R79 R81 R83 RN3 RN4 T9
component class U_FP_Connectors: J4 J5 J6 J7 LD15 LD16 LD17 LD18 P1 P2 P5 R25 R26 R27 R28 R29 R30 R31 R32 R33 R34 R36 R37 R38 R39 R40 R41 R42 R43 R86 T1 T2 T3 T4 T5 T6 T7 T8
differential pair EEM_IO.LVDS15: +EEM_IO.LVDS_P15 -EEM_IO.LVDS_N15
differential pair EEM_IO.LVDS14: +EEM_IO.LVDS_P14 -EEM_IO.LVDS_N14
differential pair EEM_IO.LVDS13: +EEM_IO.LVDS_P13 -EEM_IO.LVDS_N13
differential pair EEM_IO.LVDS12: +EEM_IO.LVDS_P12 -EEM_IO.LVDS_N12
differential pair EEM_IO.LVDS11: +EEM_IO.LVDS_P11 -EEM_IO.LVDS_N11
differential pair EEM_IO.LVDS10: +EEM_IO.LVDS_P10 -EEM_IO.LVDS_N10
differential pair EEM_IO.LVDS9: +EEM_IO.LVDS_P9 -EEM_IO.LVDS_N9
differential pair EEM_IO.LVDS8: +EEM_IO.LVDS_P8 -EEM_IO.LVDS_N8
differential pair EEM_IO.LVDS7: +EEM_IO.LVDS_P7 -EEM_IO.LVDS_N7
differential pair EEM_IO.LVDS6: +EEM_IO.LVDS_P6 -EEM_IO.LVDS_N6
differential pair EEM_IO.LVDS5: +EEM_IO.LVDS_P5 -EEM_IO.LVDS_N5
differential pair EEM_IO.LVDS4: +EEM_IO.LVDS_P4 -EEM_IO.LVDS_N4
differential pair EEM_IO.LVDS3: +EEM_IO.LVDS_P3 -EEM_IO.LVDS_N3
differential pair EEM_IO.LVDS2: +EEM_IO.LVDS_P2 -EEM_IO.LVDS_N2
differential pair EEM_IO.LVDS1: +EEM_IO.LVDS_P1 -EEM_IO.LVDS_N1
differential pair EEM_IO.LVDS0: +EEM_IO.LVDS_P0 -EEM_IO.LVDS_N0
differential pair BP_CLK.CLK: +BP_CLK.CLK_P -BP_CLK.CLK_N
differential pair ADC_IN7: +ADC_IN_P7 -ADC_IN_N7
differential pair ADC_IN6: +ADC_IN_P6 -ADC_IN_N6
differential pair ADC_IN5: +ADC_IN_P5 -ADC_IN_N5
differential pair ADC_IN4: +ADC_IN_P4 -ADC_IN_N4
differential pair ADC_IN3: +ADC_IN_P3 -ADC_IN_N3
differential pair ADC_IN2: +ADC_IN_P2 -ADC_IN_N2
differential pair ADC_IN1: +ADC_IN_P1 -ADC_IN_N1
differential pair ADC_IN0: +ADC_IN_P0 -ADC_IN_N0
differential pair BP_MGT_Tx: +BP_MGT_Tx_P -BP_MGT_Tx_N
differential pair BP_MGT_Rx: +BP_MGT_Rx_P -BP_MGT_Rx_N
differential pair BP_IO.LVDS15: +BP_IO.LVDS_P15 -BP_IO.LVDS_N15
differential pair BP_IO.LVDS14: +BP_IO.LVDS_P14 -BP_IO.LVDS_N14
differential pair BP_IO.LVDS13: +BP_IO.LVDS_P13 -BP_IO.LVDS_N13
differential pair BP_IO.LVDS12: +BP_IO.LVDS_P12 -BP_IO.LVDS_N12
differential pair BP_IO.LVDS11: +BP_IO.LVDS_P11 -BP_IO.LVDS_N11
differential pair BP_IO.LVDS10: +BP_IO.LVDS_P10 -BP_IO.LVDS_N10
differential pair BP_IO.LVDS9: +BP_IO.LVDS_P9 -BP_IO.LVDS_N9
differential pair BP_IO.LVDS8: +BP_IO.LVDS_P8 -BP_IO.LVDS_N8
differential pair BP_IO.LVDS7: +BP_IO.LVDS_P7 -BP_IO.LVDS_N7
differential pair BP_IO.LVDS6: +BP_IO.LVDS_P6 -BP_IO.LVDS_N6
differential pair BP_IO.LVDS5: +BP_IO.LVDS_P5 -BP_IO.LVDS_N5
differential pair BP_IO.LVDS4: +BP_IO.LVDS_P4 -BP_IO.LVDS_N4
differential pair BP_IO.LVDS3: +BP_IO.LVDS_P3 -BP_IO.LVDS_N3
differential pair BP_IO.LVDS2: +BP_IO.LVDS_P2 -BP_IO.LVDS_N2
differential pair BP_IO.LVDS1: +BP_IO.LVDS_P1 -BP_IO.LVDS_N1
differential pair BP_IO.LVDS0: +BP_IO.LVDS_P0 -BP_IO.LVDS_N0
differential pair ADC_CLKOUT: +ADC_CLKOUT_P -ADC_CLKOUT_N
differential pair ADC_SCK: +ADC_SCK_P -ADC_SCK_N
differential pair ADC_SDOA: +ADC_SDOA_P -ADC_SDOA_N
differential pair ADC_SDOB: +ADC_SDOB_P -ADC_SDOB_N
differential pair ADC_SDOC: +ADC_SDOC_P -ADC_SDOC_N
differential pair ADC_SDOD: +ADC_SDOD_P -ADC_SDOD_N

## Components (designator, comment, footprint, x,y, rotation, side; value= is the part's Value field where it differs from the comment)
C1A "18pF" CAPC1608X87N 64.162,81.798 r0 top (schematic designator C1)
C1B "18pF" CAPC1608X87N 64.162,71.798 r0 top (schematic designator C1)
C1C "18pF" CAPC1608X87N 64.175,61.754 r0 top (schematic designator C1)
C1D "18pF" CAPC1608X87N 64.162,51.798 r0 top (schematic designator C1)
C1E "18pF" CAPC1608X87N 64.162,41.798 r0 top (schematic designator C1)
C1F "18pF" CAPC1608X87N 64.162,31.798 r0 top (schematic designator C1)
C1G "18pF" CAPC1608X87N 64.162,21.798 r0 top (schematic designator C1)
C1H "18pF" CAPC1608X87N 64.162,11.798 r0 top (schematic designator C1)
C2A "82pF" CAPC2012X90N 70.329,78.09 r90 top (schematic designator C2)
C2B "82pF" CAPC2012X90N 70.329,68.09 r90 top (schematic designator C2)
C2C "82pF" CAPC2012X90N 70.341,58.047 r90 top (schematic designator C2)
C2D "82pF" CAPC2012X90N 70.329,48.09 r90 top (schematic designator C2)
C2E "82pF" CAPC2012X90N 70.329,38.09 r90 top (schematic designator C2)
C2F "82pF" CAPC2012X90N 70.329,28.09 r90 top (schematic designator C2)
C2G "82pF" CAPC2012X90N 70.329,18.09 r90 top (schematic designator C2)
C2H "82pF" CAPC2012X90N 70.329,8.09 r90 top (schematic designator C2)
C3A "47nF" CAPC2012X135N 79.469,83.905 r0 top (schematic designator C3)
C3B "47nF" CAPC2012X135N 79.469,73.905 r0 top (schematic designator C3)
C3C "47nF" CAPC2012X135N 79.482,63.861 r0 top (schematic designator C3)
C3D "47nF" CAPC2012X135N 79.469,53.905 r0 top (schematic designator C3)
C3E "47nF" CAPC2012X135N 79.469,43.905 r0 top (schematic designator C3)
C3F "47nF" CAPC2012X135N 79.469,33.905 r0 top (schematic designator C3)
C3G "47nF" CAPC2012X135N 79.469,23.905 r0 top (schematic designator C3)
C3H "47nF" CAPC2012X135N 79.469,13.905 r0 top (schematic designator C3)
C4A "2.2nF" CAPC2013X100N 92.353,77.206 r90 top (schematic designator C4)
C4B "2.2nF" CAPC2013X100N 92.353,67.206 r90 top (schematic designator C4)
C4C "2.2nF" CAPC2013X100N 92.366,57.162 r90 top (schematic designator C4)
C4D "2.2nF" CAPC2013X100N 92.353,47.206 r90 top (schematic designator C4)
C4E "2.2nF" CAPC2013X100N 92.353,37.206 r90 top (schematic designator C4)
C4F "2.2nF" CAPC2013X100N 92.353,27.206 r90 top (schematic designator C4)
C4G "2.2nF" CAPC2013X100N 92.353,17.206 r90 top (schematic designator C4)
C4H "2.2nF" CAPC2013X100N 92.353,7.206 r90 top (schematic designator C4)
C5A "18pF" CAPC1608X87N 64.162,80.02 r0 top (schematic designator C5)
C5B "18pF" CAPC1608X87N 64.162,70.02 r0 top (schematic designator C5)
C5C "18pF" CAPC1608X87N 64.175,59.976 r0 top (schematic designator C5)
C5D "18pF" CAPC1608X87N 64.162,50.02 r0 top (schematic designator C5)
C5E "18pF" CAPC1608X87N 64.162,40.02 r0 top (schematic designator C5)
C5F "18pF" CAPC1608X87N 64.162,30.02 r0 top (schematic designator C5)
C5G "18pF" CAPC1608X87N 64.162,20.02 r0 top (schematic designator C5)
C5H "18pF" CAPC1608X87N 64.162,10.02 r0 top (schematic designator C5)
C6A "2.2nF" CAPC2013X100N 91.603,79.956 r0 top (schematic designator C6)
C6B "2.2nF" CAPC2013X100N 91.603,69.956 r0 top (schematic designator C6)
C6C "2.2nF" CAPC2013X100N 91.616,59.912 r0 top (schematic designator C6)
C6D "2.2nF" CAPC2013X100N 91.603,49.956 r0 top (schematic designator C6)
C6E "2.2nF" CAPC2013X100N 91.603,39.956 r0 top (schematic designator C6)
C6F "2.2nF" CAPC2013X100N 91.603,29.956 r0 top (schematic designator C6)
C6G "2.2nF" CAPC2013X100N 91.603,19.956 r0 top (schematic designator C6)
C6H "2.2nF" CAPC2013X100N 91.603,9.956 r0 top (schematic designator C6)
C7A "2.2nF" CAPC2013X100N 92.353,82.956 r90 top (schematic designator C7)
C7B "2.2nF" CAPC2013X100N 92.353,72.956 r90 top (schematic designator C7)
C7C "2.2nF" CAPC2013X100N 92.366,62.912 r90 top (schematic designator C7)
C7D "2.2nF" CAPC2013X100N 92.353,52.956 r90 top (schematic designator C7)
C7E "2.2nF" CAPC2013X100N 92.353,42.956 r90 top (schematic designator C7)
C7F "2.2nF" CAPC2013X100N 92.353,32.956 r90 top (schematic designator C7)
C7G "2.2nF" CAPC2013X100N 92.353,22.956 r90 top (schematic designator C7)
C7H "2.2nF" CAPC2013X100N 92.353,12.956 r90 top (schematic designator C7)
C8A "10uF" CAPMP3216X180N 70.329,82.358 r270 top (schematic designator C8)
C8B "10uF" CAPMP3216X180N 70.329,72.358 r270 top (schematic designator C8)
C8C "10uF" CAPMP3216X180N 70.341,62.314 r270 top (schematic designator C8)
C8D "10uF" CAPMP3216X180N 70.329,52.358 r270 top (schematic designator C8)
C8E "10uF" CAPMP3216X180N 70.329,42.358 r270 top (schematic designator C8)
C8F "10uF" CAPMP3216X180N 70.329,32.358 r270 top (schematic designator C8)
C8G "10uF" CAPMP3216X180N 70.329,22.358 r270 top (schematic designator C8)
C8H "10uF" CAPMP3216X180N 70.329,12.358 r270 top (schematic designator C8)
C9A "100nF" CAPC1005X55N 73.025,83.55 r0 top (schematic designator C9)
C9B "100nF" CAPC1005X55N 73.025,73.55 r0 top (schematic designator C9)
C9C "100nF" CAPC1005X55N 73.025,63.5 r0 top (schematic designator C9)
C9D "100nF" CAPC1005X55N 73.025,53.55 r0 top (schematic designator C9)
C9E "100nF" CAPC1005X55N 73.025,43.55 r0 top (schematic designator C9)
C9F "100nF" CAPC1005X55N 73.025,33.55 r0 top (schematic designator C9)
C9G "100nF" CAPC1005X55N 73.025,23.55 r0 top (schematic designator C9)
C9H "100nF" CAPC1005X55N 73.025,13.55 r0 top (schematic designator C9)
C10A "100nF" CAPC1005X55N 72.915,75.948 r0 top (schematic designator C10)
C10B "100nF" CAPC1005X55N 72.915,65.948 r0 top (schematic designator C10)
C10C "100nF" CAPC1005X55N 72.928,55.904 r0 top (schematic designator C10)
C10D "100nF" CAPC1005X55N 72.915,45.948 r0 top (schematic designator C10)
C10E "100nF" CAPC1005X55N 72.915,35.948 r0 top (schematic designator C10)
C10F "100nF" CAPC1005X55N 72.915,25.948 r0 top (schematic designator C10)
C10G "100nF" CAPC1005X55N 72.915,15.948 r0 top (schematic designator C10)
C10H "100nF" CAPC1005X55N 72.915,5.948 r0 top (schematic designator C10)
C11A "10uF" CAPMP3216X180N 63.194,76.63 r0 top (schematic designator C11)
C11B "10uF" CAPMP3216X180N 63.194,66.63 r0 top (schematic designator C11)
C11C "10uF" CAPMP3216X180N 63.207,56.586 r0 top (schematic designator C11)
C11D "10uF" CAPMP3216X180N 63.194,46.63 r0 top (schematic designator C11)
C11E "10uF" CAPMP3216X180N 63.194,36.63 r0 top (schematic designator C11)
C11F "10uF" CAPMP3216X180N 63.194,26.63 r0 top (schematic designator C11)
C11G "10uF" CAPMP3216X180N 63.194,16.63 r0 top (schematic designator C11)
C11H "10uF" CAPMP3216X180N 63.194,6.63 r0 top (schematic designator C11)
C12A "47nF" CAPC2012X135N 87.844,83.83 r0 top (schematic designator C12)
C12B "47nF" CAPC2012X135N 87.844,73.83 r0 top (schematic designator C12)
C12C "47nF" CAPC2012X135N 87.857,63.786 r0 top (schematic designator C12)
C12D "47nF" CAPC2012X135N 87.844,53.83 r0 top (schematic designator C12)
C12E "47nF" CAPC2012X135N 87.844,43.83 r0 top (schematic designator C12)
C12F "47nF" CAPC2012X135N 87.844,33.83 r0 top (schematic designator C12)
C12G "47nF" CAPC2012X135N 87.844,23.83 r0 top (schematic designator C12)
C12H "47nF" CAPC2012X135N 87.844,13.83 r0 top (schematic designator C12)
C13A "100nF" CAPC1005X55N 85.244,83.43 r0 top (schematic designator C13)
C13B "100nF" CAPC1005X55N 85.244,73.43 r0 top (schematic designator C13)
C13C "100nF" CAPC1005X55N 85.257,63.386 r0 top (schematic designator C13)
C13D "100nF" CAPC1005X55N 85.244,53.43 r0 top (schematic designator C13)
C13E "100nF" CAPC1005X55N 85.244,43.43 r0 top (schematic designator C13)
C13F "100nF" CAPC1005X55N 85.244,33.43 r0 top (schematic designator C13)
C13G "100nF" CAPC1005X55N 85.244,23.43 r0 top (schematic designator C13)
C13H "100nF" CAPC1005X55N 85.244,13.43 r0 top (schematic designator C13)
C14A "100nF" CAPC1005X55N 90.444,76.13 r180 top (schematic designator C14)
C14B "100nF" CAPC1005X55N 90.444,66.13 r180 top (schematic designator C14)
C14C "100nF" CAPC1005X55N 90.457,56.086 r180 top (schematic designator C14)
C14D "100nF" CAPC1005X55N 90.444,46.13 r180 top (schematic designator C14)
C14E "100nF" CAPC1005X55N 90.444,36.13 r180 top (schematic designator C14)
C14F "100nF" CAPC1005X55N 90.444,26.13 r180 top (schematic designator C14)
C14G "100nF" CAPC1005X55N 90.444,16.13 r180 top (schematic designator C14)
C14H "100nF" CAPC1005X55N 90.444,6.13 r180 top (schematic designator C14)
C15 "100nF" CAPC1005X55N 122.45,7.601 r180 top
C16 "100nF" CAPC1005X55N 181.7,42.15 r180 top
C17 "100nF" CAPC1005X55N 181.05,56.1 r180 top
C18 "100nF" CAPC1005X55N 166.728,52.169 r180 top
C19 "100nF" CAPC1005X55N 181.677,47.395 r180 top
C20 "100nF" CAPC1005X55N 181.677,36.895 r180 top
C21 "100nF" CAPC1005X55N 181.677,31.62 r180 top
C22 "100nF" CAPC1005X55N 181.677,26.37 r180 top
C23 "100nF" CAPC1005X55N 181.677,21.12 r180 top
C24 "100nF" CAPC1005X55N 166.728,59.669 r180 top
C25 "100nF" CAPC1005X55N 161.228,55.169 r180 top
C26 "1uF" CAPC1608X87N 121.678,21.01 r180 top
C27 "100nF" CAPC1005X55N 161.227,47.669 r180 top
C28 "100nF" CAPC1005X55N 166.628,44.7 r180 top
C29 "100nF" CAPC1005X55N 132.025,7.75 r90 top
C30 "100nF" CAPC1005X55N 161.227,40.17 r180 top
C32 "100nF" CAPC1005X55N 102.302,80.554 r0 top
C33 "100nF" CAPC1005X55N 104.3,10.6 r90 top
C37 "1uF" CAPC1608X87N 124.679,49.409 r90 top
C38 "10uF" CAPMP3216X180N 114.925,52.325 r90 top
C39 "100nF" CAPC1005X55N 117.25,51.425 r180 top
C40 "10nF" CAPC1005X55N 114.743,46.298 r0 top
C41 "1uF" CAPC1608X87N 116.644,12.519 r90 top
C42 "10nF" CAPC1005X55N 119.675,10.4 r180 top
C43 "1uF" CAPC1608X87N 123.775,16.8 r180 top
C44 "10uF" CAPMP3216X180N 114.725,12.832 r270 top
C45 "100nF" CAPC1005X55N 114.725,15.8 r180 top
C46 "10nF" CAPC1005X55N 117.912,19.2 r180 top
C47 "10uF" CAPMP3216X180N 123.875,13.5 r270 top
C48 "22uF" CAPC2012X135N 122.194,84.38 r270 top
C49 "22uF" CAPC2012X135N 121.944,75.63 r180 top
C50 "10uF" CAPMP3216X180N 121.444,73.38 r0 top
C51 "1uF" CAPC1608X87N 115.819,69.4 r90 top
C52 "10uF" CAPMP3216X180N 157.5,64.5 r270 top
C53 "22uF" CAPC2012X135N 154.7,71.9 r270 top
C54 "22uF" CAPC2012X135N 157.5,71.9 r270 top
C55 "22uF" CAPC2012X135N 149.753,62.901 r0 top
C56 "22uF" CAPC2012X135N 149.753,60.742 r0 top
C57 "22uF" CAPC2012X135N 166,67.3 r90 top
C58 "22uF" CAPC2012X135N 128.194,62.63 r0 top
C59 "22uF" CAPC2012X135N 125.194,63.63 r90 top
C60 "10uF" CAPMP3216X180N 121,62.4 r0 top
C61 "1uF" CAPC1608X87N 121.678,22.535 r180 top
C62 "10uF" CAPMP3216X180N 121.578,25.76 r270 top
C63 "10uF" CAPMP3216X180N 114.175,21.6 r90 top
C64 "100nF" CAPC1005X55N 114.2,24.7 r0 top
C65 "1uF" CAPC1608X87N 128.575,17.125 r0 top
C66 "1uF" CAPC1608X87N 137.391,64.77 r270 top
C67 "10uF" CAPMP3216X180N 145.85,47.88 r180 top
C68 "22uF" CAPC2012X135N 120.65,40.9 r270 top
C69 "100nF" CAPC1005X55N 147.512,59.044 r90 top
C70 "22uF" CAPC2012X135N 145.048,59.018 r0 top
C71 "1uF" CAPC1608X87N 114.15,40 r90 top
C72 "1uF" CAPC1608X87N 133.325,10.75 r90 top
C73 "100nF" CAPC1005X55N 141.141,65.77 r180 top
C74 "22uF" CAPC2012X135N 139.409,64.555 r270 top
C75 "10nF" CAPC1005X55N 117.2,37.85 r180 top
C76 "100nF" CAPC1005X55N 114.15,42 r0 top
C77 "10uF" CAPMP3216X180N 112.05,42 r90 top
C78 "100nF" CAPC1005X55N 135.641,57.27 r90 top
C79 "22uF" CAPC2012X135N 129.2,57.7 r270 top
C80 "10uF" CAPMP3216X180N 127.944,47.88 r180 top
C81 "22uF" CAPC2012X135N 128.75,32.1 r90 top
C82 "10nF" CAPC1005X55N 119.096,29.389 r0 top
C83 "100nF" CAPC1005X55N 119.546,32.75 r90 top
C84 "10uF" CAPMP3216X180N 115.65,31.1 r270 top
C85 "100nF" CAPC1005X55N 139.391,59.02 r180 top
C86 "22uF" CAPC2012X135N 138.141,57.27 r0 top
C87 "100nF" CAPC1005X55N 100.432,31.2 r90 top
C88 "100nF" CAPC1005X55N 98.933,31.2 r90 top
C89 "100nF" CAPC1005X55N 102.258,43.897 r270 top
C90 "100nF" CAPC1005X55N 98.45,43.197 r180 top
C91 "10uF" CAPC2012X95N 97.155,30.657 r90 top
C92 "100nF" CAPC1005X55N 106.034,36.232 r270 top
C93 "100nF" CAPC1005X55N 106.034,39.346 r270 top
C94 "10uF" CAPC2012X95N 108.752,41.13 r270 top
C95 "10uF" CAPC2012X95N 101.944,30.38 r90 top
C96 "10uF" CAPC2012X95N 95.069,35.466 r90 top
C97 "10uF" CAPC2012X95N 95.069,38.895 r270 top
C98 "10uF" CAPC2012X95N 100.715,44.221 r270 top
C99 "10uF" CAPC2012X95N 95.069,31.542 r90 top
C100 "2.2uF" CAPC1608X87N 101.483,21.6 r270 top
C101 "1uF" CAPC1608X87N 101.483,13.803 r270 top
C102 "1uF" CAPC1608X87N 101.483,18.5 r270 top
C103 "47nF" CAPC2012X135N 105.111,57.813 r270 top
C104 "100nF" CAPC1005X55N 103.056,59.995 r0 top
C105 "100nF" CAPC1005X55N 98.75,55.5 r180 top
C106 "47nF" CAPC2012X135N 99.5,60.5 r0 top
CLIP1 "S1411-46R" CLIP_HOLLAND-SHIELDING_LC 32.444,79.88 r90 top
CLIP2 "S1411-46R" CLIP_HOLLAND-SHIELDING_LC 32.444,10.88 r90 top
CLIP3 "S1411-46R" CLIP_HOLLAND-SHIELDING_LC 107.444,26.88 r90 top
CLIP4 "S1411-46R" CLIP_HOLLAND-SHIELDING_LC 107.444,64.88 r90 top
CLIP5 "S1411-46R" CLIP_HOLLAND-SHIELDING_LC 32.444,27.88 r90 top
CLIP6 "S1411-46R" CLIP_HOLLAND-SHIELDING_LC 32.444,46.88 r90 top
CLIP7 "S1411-46R" CLIP_HOLLAND-SHIELDING_LC 32.444,65.88 r90 top
CLIP8 "S1411-46R" CLIP_HOLLAND-SHIELDING_LC 51.444,89.88 r180 top
CLIP9 "S1411-46R" CLIP_HOLLAND-SHIELDING_LC 71,89.88 r180 top
CLIP10 "S1411-46R" CLIP_HOLLAND-SHIELDING_LC 89,89.88 r180 top
CLIP11 "S1411-46R" CLIP_HOLLAND-SHIELDING_LC 107.444,82.88 r90 top
CLIP12 "S1411-46R" CLIP_HOLLAND-SHIELDING_LC 107.444,47.88 r90 top
CLIP13 "S1411-46R" CLIP_HOLLAND-SHIELDING_LC 39.444,-0.12 r180 top
CLIP14 "S1411-46R" CLIP_HOLLAND-SHIELDING_LC 89,-0.12 r180 top
CLIP15 "S1411-46R" CLIP_HOLLAND-SHIELDING_LC 107.444,7.88 r90 top
CLIP16 "S1411-46R" CLIP_HOLLAND-SHIELDING_LC 71,-0.12 r180 top
CLIP17 "S1411-46R" CLIP_HOLLAND-SHIELDING_LC 51.444,-0.12 r180 top
CLIP18 "S1411-46R" CLIP_HOLLAND-SHIELDING_LC 38.444,89.88 r180 top
D1A "BAV199" SOT95P240X110-3N 67.433,81.418 r270 top (schematic designator D1)
D1B "BAV199" SOT95P240X110-3N 67.433,71.418 r270 top (schematic designator D1)
D1C "BAV199" SOT95P240X110-3N 67.446,61.374 r270 top (schematic designator D1)
D1D "BAV199" SOT95P240X110-3N 67.433,51.418 r270 top (schematic designator D1)
D1E "BAV199" SOT95P240X110-3N 67.433,41.418 r270 top (schematic designator D1)
D1F "BAV199" SOT95P240X110-3N 67.433,31.418 r270 top (schematic designator D1)
D1G "BAV199" SOT95P240X110-3N 67.433,21.418 r270 top (schematic designator D1)
D1H "BAV199" SOT95P240X110-3N 67.433,11.418 r270 top (schematic designator D1)
D2A "BAV199" SOT95P240X110-3N 67.433,77.506 r90 top (schematic designator D2)
D2B "BAV199" SOT95P240X110-3N 67.433,67.506 r90 top (schematic designator D2)
D2C "BAV199" SOT95P240X110-3N 67.446,57.462 r90 top (schematic designator D2)
D2D "BAV199" SOT95P240X110-3N 67.433,47.506 r90 top (schematic designator D2)
D2E "BAV199" SOT95P240X110-3N 67.433,37.506 r90 top (schematic designator D2)
D2F "BAV199" SOT95P240X110-3N 67.433,27.506 r90 top (schematic designator D2)
D2G "BAV199" SOT95P240X110-3N 67.433,17.506 r90 top (schematic designator D2)
D2H "BAV199" SOT95P240X110-3N 67.433,7.506 r90 top (schematic designator D2)
D5 "SMBJ12A" DIOM5336X265N 80.169,87.13 r0 top
D6 "SMBJ12A" DIOM5336X265N 79.694,3.13 r180 top
D7 "1N4148WS" SODFL2512X100N 131.011,18.242 r270 top
D8 "1N4148WS" SODFL2512X100N 134.641,64.77 r0 top
D9 "1N4148WS" SODFL2512X100N 128.786,7.742 r0 top
D10 "1N4148WS" SODFL2512X100N 128.5,45.9 r180 top
FTG1 "Use only in PCB" FIDUCIAL_TOP_C100-200 192,90.5 r90 top
FTG2 "Use only in PCB" FIDUCIAL_TOP_S100-200 9,-1 r90 top
FTG3 "Use only in PCB" FIDUCIAL_TOP_S100-200 182.5,-1.1 r90 top
FTG4 "Use only in PCB" FIDUCIAL_TOP_C100-200 192,90.5 r90 bottom
FTG5 "Use only in PCB" FIDUCIAL_TOP_S100-200 9,-1 r90 bottom
FTG6 "Use only in PCB" FIDUCIAL_TOP_S100-200 182.5,-1.1 r90 bottom
IC1A "OPA2197IDGKR" SOP65P490X110-8N 87.944,79.109 r90 top (schematic designator IC1)
IC1B "OPA2197IDGKR" SOP65P490X110-8N 87.944,69.109 r90 top (schematic designator IC1)
IC1C "OPA2197IDGKR" SOP65P490X110-8N 87.957,59.065 r90 top (schematic designator IC1)
IC1D "OPA2197IDGKR" SOP65P490X110-8N 87.944,49.109 r90 top (schematic designator IC1)
IC1E "OPA2197IDGKR" SOP65P490X110-8N 87.944,39.109 r90 top (schematic designator IC1)
IC1F "OPA2197IDGKR" SOP65P490X110-8N 87.944,29.109 r90 top (schematic designator IC1)
IC1G "OPA2197IDGKR" SOP65P490X110-8N 87.944,19.109 r90 top (schematic designator IC1)
IC1H "OPA2197IDGKR" SOP65P490X110-8N 87.944,9.109 r90 top (schematic designator IC1)
IC2A "AD8253ARMZ" SOP50P490X110-10N 73.275,79.767 r90 top (schematic designator IC2)
IC2B "AD8253ARMZ" SOP50P490X110-10N 73.275,69.767 r90 top (schematic designator IC2)
IC2C "AD8253ARMZ" SOP50P490X110-10N 73.288,59.723 r90 top (schematic designator IC2)
IC2D "AD8253ARMZ" SOP50P490X110-10N 73.275,49.767 r90 top (schematic designator IC2)
IC2E "AD8253ARMZ" SOP50P490X110-10N 73.275,39.767 r90 top (schematic designator IC2)
IC2F "AD8253ARMZ" SOP50P490X110-10N 73.275,29.767 r90 top (schematic designator IC2)
IC2G "AD8253ARMZ" SOP50P490X110-10N 73.275,19.767 r90 top (schematic designator IC2)
IC2H "AD8253ARMZ" SOP50P490X110-10N 73.275,9.767 r90 top (schematic designator IC2)
IC3 "PCF8574ADW" SOIC127P1030X265-16N 115.605,3.156 r0 top
IC4 "FIN1101K8X" SOP50P310X90-8N 182.917,57.914 r180 top
IC5 "FIN1101K8X" SOP50P310X90-8N 166.728,49.444 r90 top
IC6 "SN65LVDS2DBVR" SOT95P280X145-5N 182.177,49.97 r90 top
IC7 "SN65LVDS2DBVR" SOT95P280X145-5N 182.177,44.72 r90 top
IC8 "SN65LVDS2DBVR" SOT95P280X145-5N 182.177,39.47 r90 top
IC9 "SN65LVDS2DBVR" SOT95P280X145-5N 182.177,34.22 r90 top
IC10 "SN65LVDS1DBVT" SOT95P280X145-5N 182.177,28.97 r90 top
IC11 "SN65LVDS2DBVR" SOT95P280X145-5N 182.177,23.72 r90 top
IC13 "FIN1101K8X" SOP50P310X90-8N 166.728,56.944 r90 top
IC14 "FIN1101K8X" SOP50P310X90-8N 161.228,52.444 r90 top
IC15 "FIN1101K8X" SOP50P310X90-8N 161.227,44.944 r90 top
IC16 "FIN1101K8X" SOP50P310X90-8N 166.728,41.945 r90 top
IC17 "FIN1101K8X" SOP50P310X90-8N 161.227,37.445 r90 top
IC19 "SN74LV595APWT" SOP65P640X120-16N 99.449,77.225 r0 top
IC20 "SN74LV595APWT" SOP65P640X120-16N 99.449,8.762 r0 top
IC21 "LT1763CS8#PBF" SOIC127P600X175-8N 120.034,48.203 r0 top
IC22 "LT1761ES5-SD#TRMPBF" SOT95P280X100-5N 119.694,16.119 r180 top
IC23 "LT1761ES5-BYP#TRMPBF" SOT95P280X100-5N 119.744,12.619 r180 top
IC24 "LT1964EDD#PBF" LT-DD-8_V 117.912,21.36 r0 top
IC25 "CC6-1212DF-E" CC6-1212DF-E 149.614,67.615 r180 top
IC26 "LT1964ES5-SD#TRMPBF" SOT95P280X100-5N 117.837,24.997 r180 top
IC27 "LM393AD" SOIC127P600X175-8N 129.786,12.492 r270 top
IC28 "TPS62175DQC" SON50P200X300X80-11N-R94X250 142.192,63.415 r0 top
IC29 "LT1761ES5-SD#TRMPBF" SOT95P280X100-5N 117.25,43.6 r180 top
IC30 "LT1761ES5-BYP#TRMPBF" SOT95P280X100-5N 117.25,40.1 r180 top
IC31 "TPS62175DQC" SON50P200X300X80-11N-R94X250 136.641,60.02 r180 top
IC32 "LT1763CS8#PBF" SOIC127P600X175-8N 123.796,31.294 r0 top
IC33 "LTC6655CHLS8-4.096" LCCS127P500X500X145-8N 97.344,16.634 r90 top
IC34 "LTC6655BHMS8-4.096#PBF" SOP65P490X110-8N 104.019,16.705 r90 top
IC35 "OPA2197IDGKR" SOP65P490X110-8N 100.875,57.75 r0 top
IC36 "LTC2320HUKG-16#PBF" QFN50P700X800X80_HS-53M 100.614,37.415 r0 top
J4 "73171-3150" MOLEX_73171-3150 6.7,72.45 r0 top locked
J5 "73171-3150" MOLEX_73171-3150 6.7,52.45 r0 top locked
J6 "73171-3150" MOLEX_73171-3150 6.7,32.45 r0 top locked
J7 "73171-3150" MOLEX_73171-3150 6.7,12.45 r0 top locked
L1A "2x6.5mH" IND_WURTH_WE-SL2 54.51,80.574 r0 top (schematic designator L1)
L1B "2x6.5mH" IND_WURTH_WE-SL2 54.51,70.574 r0 top (schematic designator L1)
L1C "2x6.5mH" IND_WURTH_WE-SL2 54.523,60.53 r0 top (schematic designator L1)
L1D "2x6.5mH" IND_WURTH_WE-SL2 54.51,50.574 r0 top (schematic designator L1)
L1E "2x6.5mH" IND_WURTH_WE-SL2 54.51,40.574 r0 top (schematic designator L1)
L1F "2x6.5mH" IND_WURTH_WE-SL2 54.51,30.574 r0 top (schematic designator L1)
L1G "2x6.5mH" IND_WURTH_WE-SL2 54.51,20.574 r0 top (schematic designator L1)
L1H "2x6.5mH" IND_WURTH_WE-SL2 54.51,10.574 r0 top (schematic designator L1)
L2 "10uH" IND_MURATA-PS_8400 121.944,79.63 r270 top
L3 "10uH" IND_MURATA-PS_8400 115.9,73.4 r180 top
L4 "10uH" IND_MURATA-PS_8400 161.8,68.2 r180 top
L5 "10uH" IND_MURATA-PS_8400 125.944,58.63 r270 top
L6 "10uH" IND_MURATA-PS_8400 115.9,65.7 r180 top
L7 "10uH" IND_MURATA-PS_8400 146.165,63.235 r270 top
L8 "10uH" IND_MURATA-PS_8400 146.571,53.129 r270 top
L9 "10uH" IND_MURATA-PS_8400 132.313,58.695 r270 top
L10 "10uH" IND_MURATA-PS_8400 130,53.129 r270 top
LD1 "Green" LED_KINGBRIGHT_KPH-1608CGCK 112.05,75.64 r90 top
LD2 "Green" LED_KINGBRIGHT_KPH-1608CGCK 180.2,1.271 r180 top
LD3 "Green" LED_KINGBRIGHT_KPH-1608CGCK 112,53.8 r270 top
LD4 "Green" LED_KINGBRIGHT_KPH-1608CGCK 112.05,17.325 r270 top
LD5 "Green" LED_KINGBRIGHT_KPH-1608CGCK 131.8,46.2 r0 top
LD6 "Green" LED_KINGBRIGHT_KPH-1608CGCK 112.05,30.338 r90 top
LD7 "Green" LED_KINGBRIGHT_KPH-1608CGCK 149.7,56.897 r180 top
LD8 "Green" LED_KINGBRIGHT_KPH-1608CGCK 149.7,46.2 r0 top
LD9 "Green" LED_KINGBRIGHT_KPH-1608CGCK 171.6,1.271 r180 top
LD10 "Green" LED_KINGBRIGHT_KPH-1608CGCK 162.975,1.271 r180 top
LD11 "Green" LED_KINGBRIGHT_KPH-1608CGCK 112.05,35.875 r90 top
LD12 "Green" LED_KINGBRIGHT_KPH-1608CGCK 112.05,24.9 r90 top
LD13 "Green" LED_KINGBRIGHT_KPH-1608CGCK 112.05,63.46 r270 top
LD14 "Red/Green" LED_DIALIGHT_571-0112F -0.9,82.4 r0 top
LD15 "Green/Green" LED_DIALIGHT_571-0122F -0.9,79.786 r0 top
LD16 "Green/Green" LED_DIALIGHT_571-0122F -0.9,62.591 r0 top
LD17 "Green/Green" LED_DIALIGHT_571-0122F -0.9,42.591 r0 top
LD18 "Green/Green" LED_DIALIGHT_571-0122F -0.9,22.591 r0 top
M1 "Plated Hole" MTG300_600 157.944,2.48 r0 top
M2 "Plated Hole" MTG300_600 157.944,87.48 r180 top
NUT1 "M3" BOSSARD_BN81-1400401_v 23.8,87.48 r180 bottom
NUT2 "M3" BOSSARD_BN81-1400401_v 23.844,2.48 r180 bottom
P1 "61300621121" 61300621121 11.8,75 r270 top locked
P2 "61300621121" 61300621121 11.8,35 r270 top locked
P5 "61302621121" 61302621121 22.93,45.45 r90 top locked
R1A "Undefined" RESC1608X55N 54.764,82.86 r0 top (schematic designator R1)
R1B "Undefined" RESC1608X55N 54.764,72.86 r0 top (schematic designator R1)
R1C "Undefined" RESC1608X55N 54.777,62.816 r0 top (schematic designator R1)
R1D "Undefined" RESC1608X55N 54.764,52.86 r0 top (schematic designator R1)
R1E "Undefined" RESC1608X55N 54.764,42.86 r0 top (schematic designator R1)
R1F "Undefined" RESC1608X55N 54.764,32.86 r0 top (schematic designator R1)
R1G "Undefined" RESC1608X55N 54.764,22.86 r0 top (schematic designator R1)
R1H "Undefined" RESC1608X55N 54.764,12.86 r0 top (schematic designator R1)
R2A "0" RESC1608X55N 60.352,82.56 r90 top (schematic designator R2)
R2B "0" RESC1608X55N 60.352,72.56 r90 top (schematic designator R2)
R2C "0" RESC1608X55N 60.365,62.516 r90 top (schematic designator R2)
R2D "0" RESC1608X55N 60.352,52.56 r90 top (schematic designator R2)
R2E "0" RESC1608X55N 60.352,42.56 r90 top (schematic designator R2)
R2F "0" RESC1608X55N 60.352,32.56 r90 top (schematic designator R2)
R2G "0" RESC1608X55N 60.352,22.56 r90 top (schematic designator R2)
R2H "0" RESC1608X55N 60.352,12.56 r90 top (schematic designator R2)
R3A "1k8" RESC1608X55N 64.162,83.322 r0 top (schematic designator R3)
R3B "1k8" RESC1608X55N 64.162,73.322 r0 top (schematic designator R3)
R3C "1k8" RESC1608X55N 64.175,63.278 r0 top (schematic designator R3)
R3D "1k8" RESC1608X55N 64.162,53.322 r0 top (schematic designator R3)
R3E "1k8" RESC1608X55N 64.162,43.322 r0 top (schematic designator R3)
R3F "1k8" RESC1608X55N 64.162,33.322 r0 top (schematic designator R3)
R3G "1k8" RESC1608X55N 64.162,23.322 r0 top (schematic designator R3)
R3H "1k8" RESC1608X55N 64.162,13.322 r0 top (schematic designator R3)
R4A "100k" RESC1608X55N 61.876,82.56 r90 top (schematic designator R4)
R4B "100k" RESC1608X55N 61.876,72.56 r90 top (schematic designator R4)
R4C "100k" RESC1608X55N 61.889,62.516 r90 top (schematic designator R4)
R4D "100k" RESC1608X55N 61.876,52.56 r90 top (schematic designator R4)
R4E "100k" RESC1608X55N 61.876,42.56 r90 top (schematic designator R4)
R4F "100k" RESC1608X55N 61.876,32.56 r90 top (schematic designator R4)
R4G "100k" RESC1608X55N 61.876,22.56 r90 top (schematic designator R4)
R4H "100k" RESC1608X55N 61.876,12.56 r90 top (schematic designator R4)
R5A "49R9" RESC6331X70N 47.694,81.205 r90 top (schematic designator R5)
R5B "49R9" RESC6331X70N 47.694,71.205 r90 top (schematic designator R5)
R5C "49R9" RESC6331X70N 47.707,61.161 r90 top (schematic designator R5)
R5D "49R9" RESC6331X70N 47.694,51.205 r90 top (schematic designator R5)
R5E "49R9" RESC6331X70N 47.694,41.205 r90 top (schematic designator R5)